# EAGLE board SparkFun Soft Power Switch-Panel (EAGLE 9.6.2), part 1 of 4
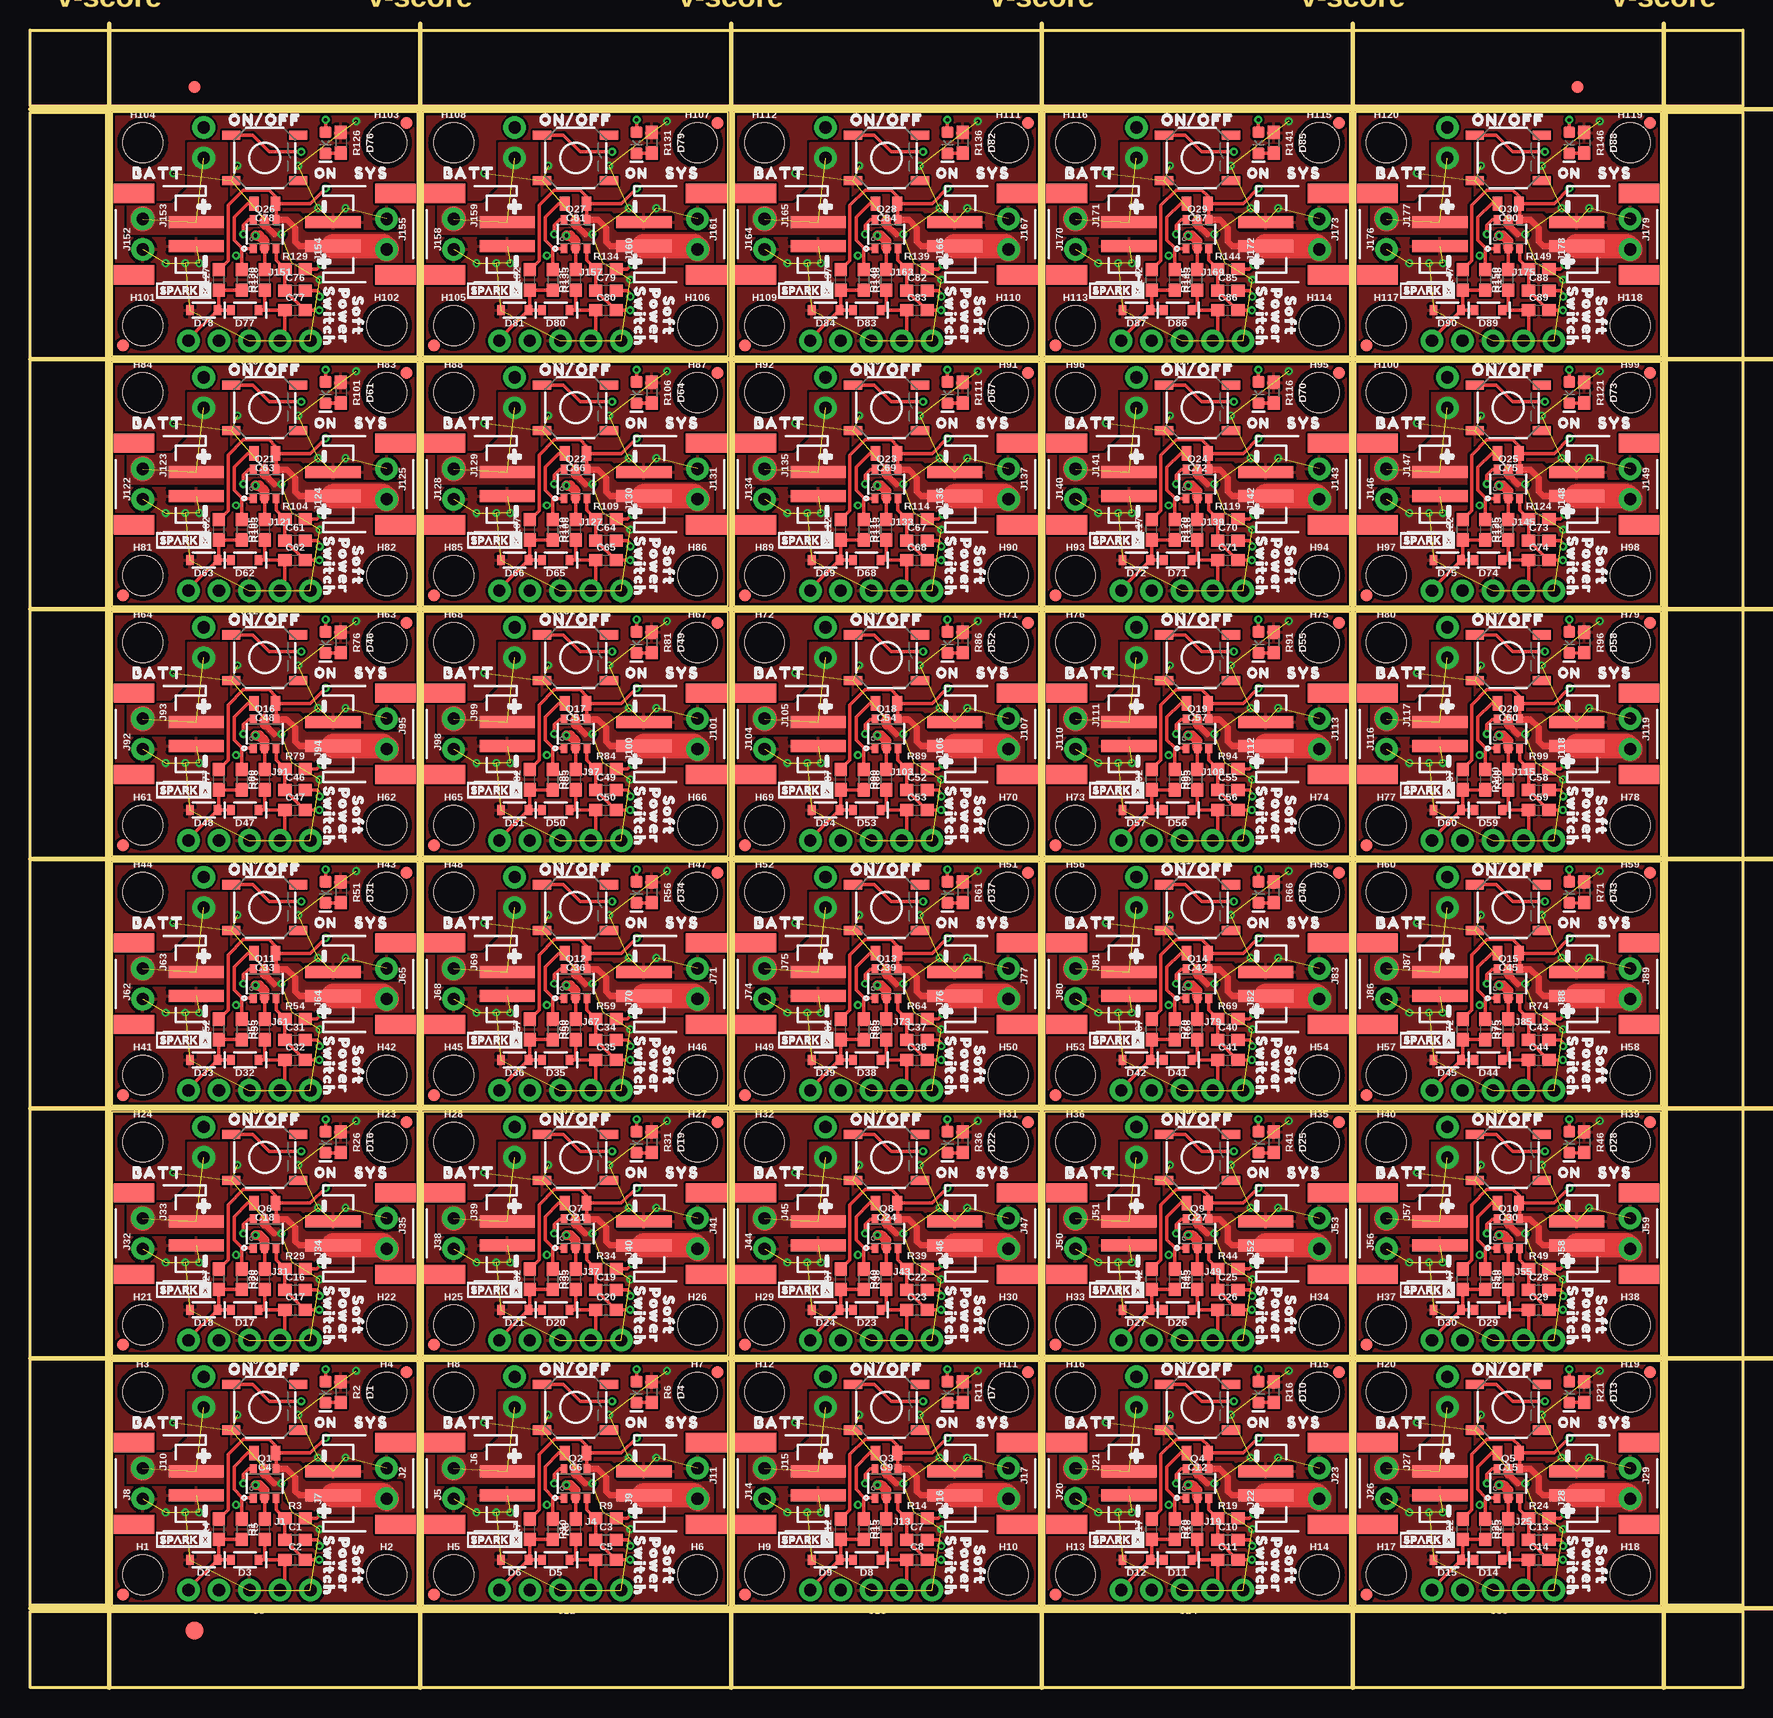
[diagram p0: board, top side]
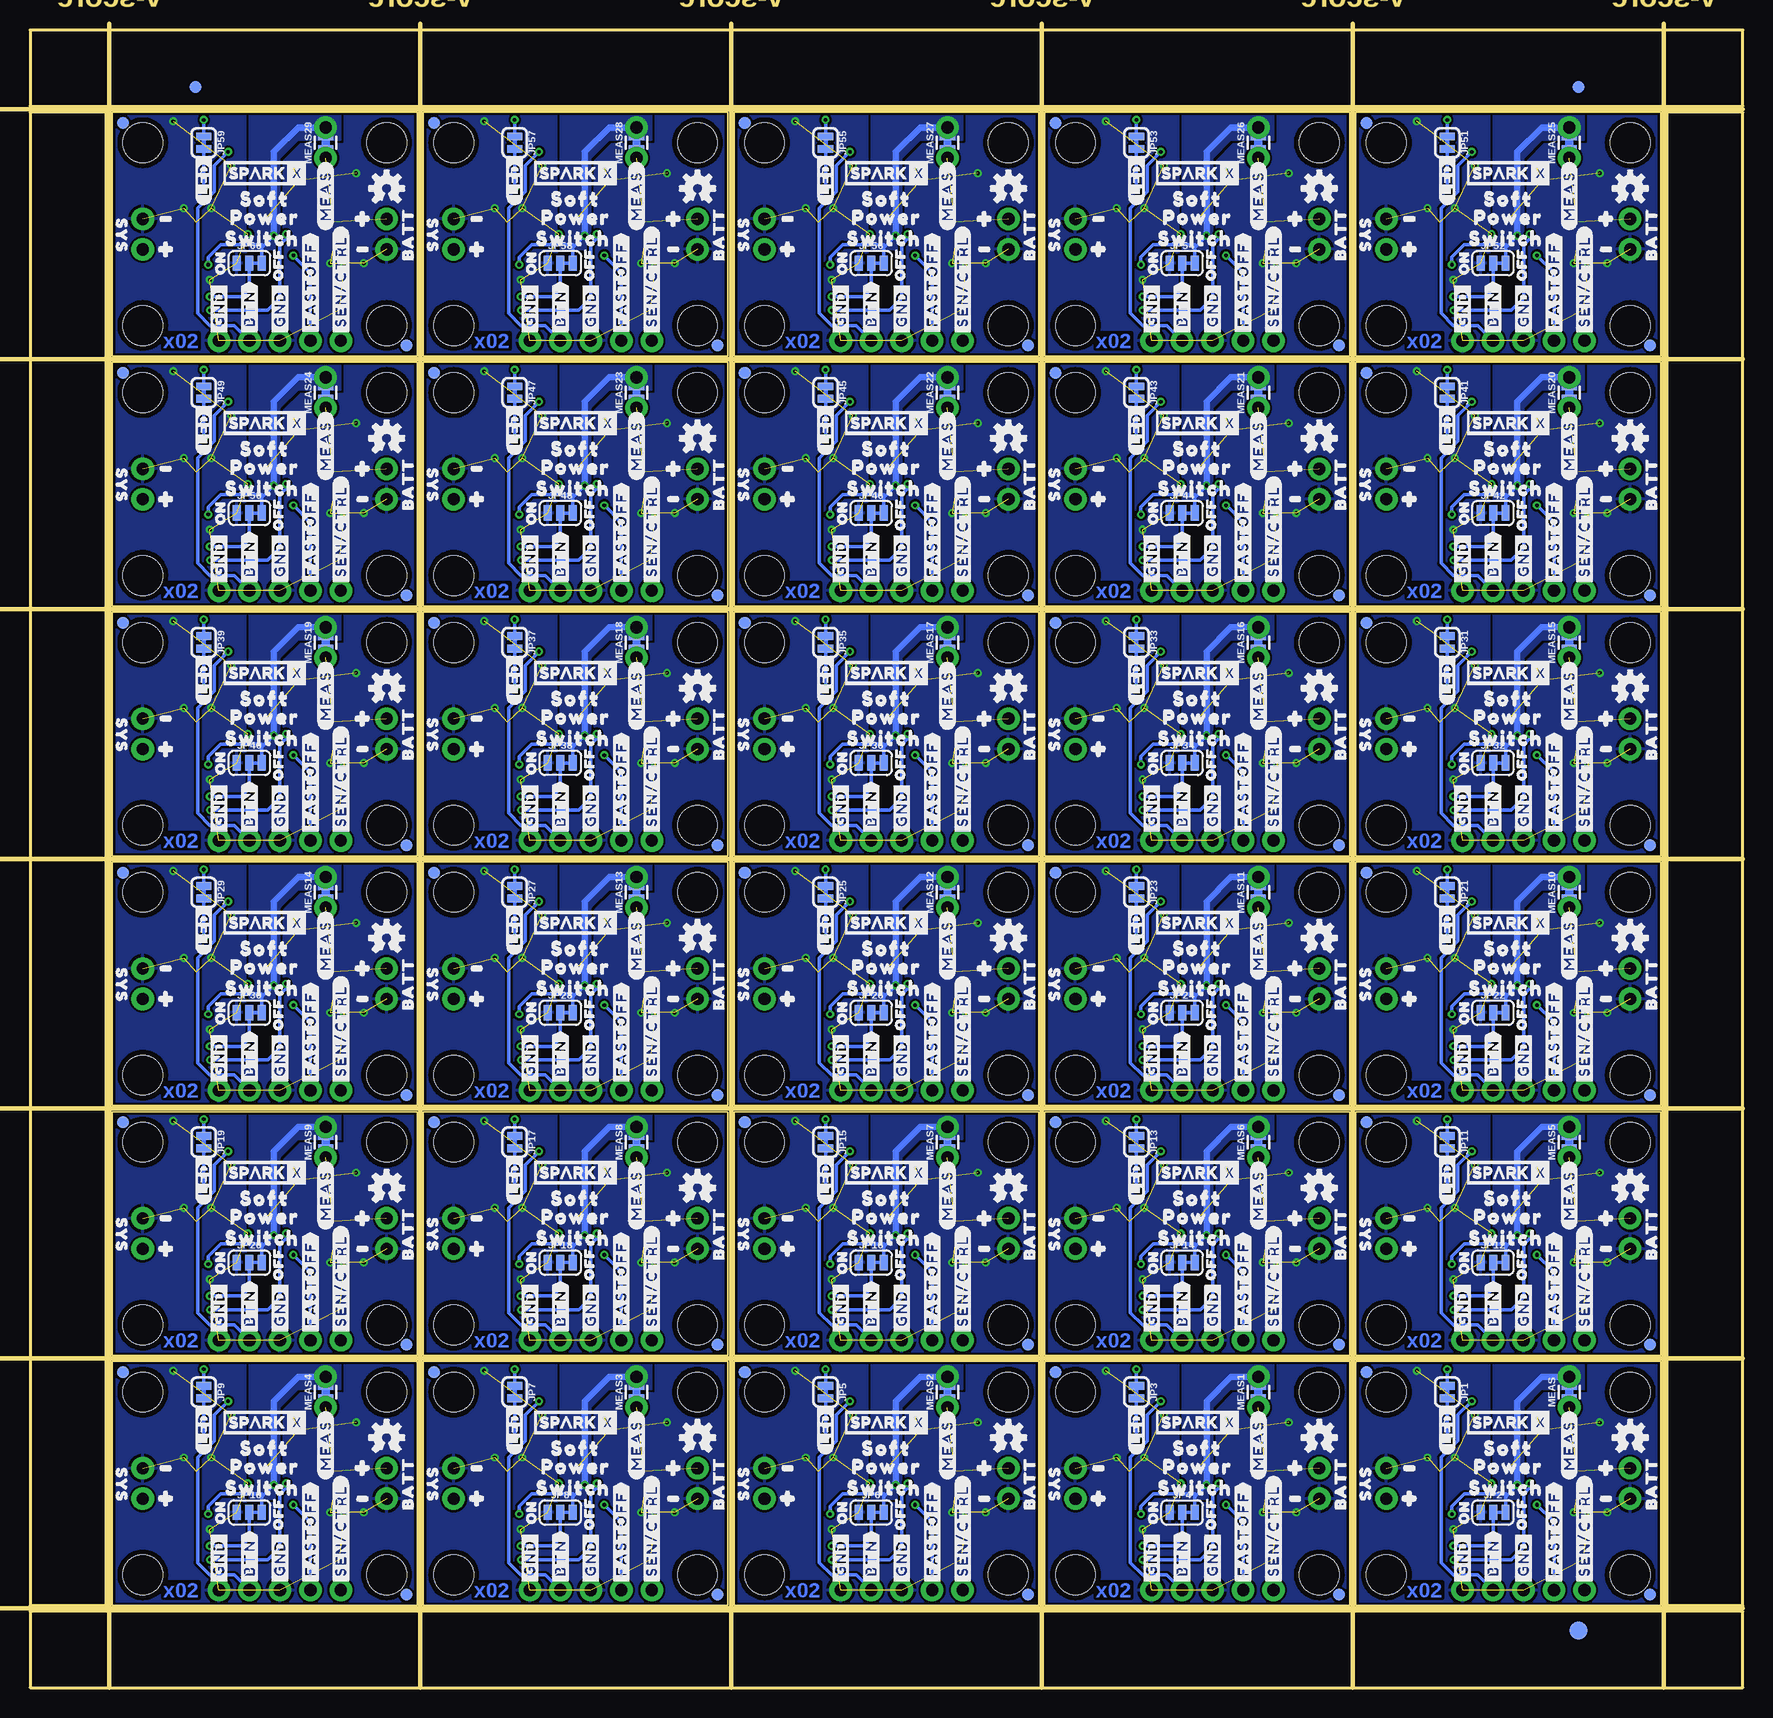
[diagram p1: board, bottom side, seen from below]

Size 142.75 x 138.18 mm. Coordinates in mm from the lower left corner, seen from the top.
Outline: 6.86,6.86 6.86,27.18 32.26,27.18 32.26,6.86 6.86,6.86
Outline: 32.77,6.86 32.77,27.18 58.17,27.18 58.17,6.86 32.77,6.86
Outline: 58.67,6.86 58.67,27.18 84.07,27.18 84.07,6.86 58.67,6.86
Outline: 84.58,6.86 84.58,27.18 109.98,27.18 109.98,6.86 84.58,6.86
Outline: 110.49,6.86 110.49,27.18 135.89,27.18 135.89,6.86 110.49,6.86
Outline: 6.86,27.69 6.86,48.01 32.26,48.01 32.26,27.69 6.86,27.69
Outline: 32.77,27.69 32.77,48.01 58.17,48.01 58.17,27.69 32.77,27.69
Outline: 58.67,27.69 58.67,48.01 84.07,48.01 84.07,27.69 58.67,27.69
Outline: 84.58,27.69 84.58,48.01 109.98,48.01 109.98,27.69 84.58,27.69
Outline: 110.49,27.69 110.49,48.01 135.89,48.01 135.89,27.69 110.49,27.69
Outline: 6.86,48.51 6.86,68.83 32.26,68.83 32.26,48.51 6.86,48.51
Outline: 32.77,48.51 32.77,68.83 58.17,68.83 58.17,48.51 32.77,48.51
Outline: 58.67,48.51 58.67,68.83 84.07,68.83 84.07,48.51 58.67,48.51
Outline: 84.58,48.51 84.58,68.83 109.98,68.83 109.98,48.51 84.58,48.51
Outline: 110.49,48.51 110.49,68.83 135.89,68.83 135.89,48.51 110.49,48.51
Outline: 6.86,69.34 6.86,89.66 32.26,89.66 32.26,69.34 6.86,69.34
Outline: 32.77,69.34 32.77,89.66 58.17,89.66 58.17,69.34 32.77,69.34
Outline: 58.67,69.34 58.67,89.66 84.07,89.66 84.07,69.34 58.67,69.34
Outline: 84.58,69.34 84.58,89.66 109.98,89.66 109.98,69.34 84.58,69.34
Outline: 110.49,69.34 110.49,89.66 135.89,89.66 135.89,69.34 110.49,69.34
Outline: 6.86,90.17 6.86,110.49 32.26,110.49 32.26,90.17 6.86,90.17
Outline: 32.77,90.17 32.77,110.49 58.17,110.49 58.17,90.17 32.77,90.17
Outline: 58.67,90.17 58.67,110.49 84.07,110.49 84.07,90.17 58.67,90.17
Outline: 84.58,90.17 84.58,110.49 109.98,110.49 109.98,90.17 84.58,90.17
Outline: 110.49,90.17 110.49,110.49 135.89,110.49 135.89,90.17 110.49,90.17
Outline: 6.86,111 6.86,131.32 32.26,131.32 32.26,111 6.86,111
Outline: 32.77,111 32.77,131.32 58.17,131.32 58.17,111 32.77,111
Outline: 58.67,111 58.67,131.32 84.07,131.32 84.07,111 58.67,111
Outline: 84.58,111 84.58,131.32 109.98,131.32 109.98,111 84.58,111
Outline: 110.49,111 110.49,131.32 135.89,131.32 135.89,111 110.49,111
Outline: 0,6.35 142.75,6.35 142.75,0 0,0 0,6.35
Outline: 136.4,131.32 142.75,131.32 142.75,6.86 136.4,6.86 136.4,131.32
Outline: 0,138.18 142.75,138.18 142.75,131.83 0,131.83 0,138.18
Outline: 0,131.32 6.35,131.32 6.35,6.86 0,6.86 0,131.32
Copper layers (1*16): Top 0.035mm / dielectric 1.5mm / Bottom 0.035mm
Design rules "SparkFun Soft Power Switch": minimum track width 7mil, minimum drill 0.3mm, track to track 7mil, track to pad 7mil, pad to pad 7mil, via to via 7mil, smd to smd 7mil, copper to edge 7mil, drill to drill 7mil, minimum pad ring 7mil, minimum via ring 7mil, stop-mask expansion 4mil, vias tented up to drill 25mil, thermal gap 10mil
Net classes: 1 power: width 0.305 mm
Milling: 13 lines

## Footprints (pad centres in the part's own frame; a part is rotated, then mirrored left to right if it is on the bottom)
0603 = smd 1.1 x 1: 1 -0.85,0; 2 0.85,0
0805 = smd 0.8 x 1.2: 1 -0.9,0; 2 0.9,0
LED-0603 = smd 1 x 1: A -0.877,0; C 0.877,0
SOD-323 = smd 0.63 x 0.83: A 1.15,0; C -1.15,0
FIDUCIAL-1X2 = smd 1 x 1: 1 0,0
FIDUCIAL-1.5X3 = smd 1.5 x 1.5: 1 0,0
STAND-OFF = hole 3.302: 0,0
1X02_NO_SILK = drill 1.016 pad 1.88: 1 0,0; 2 2.54,0
JST-2-SMD = smd 1 x 4.6: 1 -1,-3.7; 2 1,-3.7 | smd 1.6 x 3.4: NC1 -3.4,1.5; NC2 3.4,1.5
1X03_NO_SILK = drill 1.016 pad 1.88: 1 0,0; 2 2.54,0; 3 5.08,0
SMT-JUMPER_2_NC_TRACE_SILK = smd 0.66 x 1.27: 1 -0.521,0; 2 0.521,0
SMT-JUMPER_3_1-NC_TRACE_SILK = smd 0.66 x 1.27: 1 -1.041,0; 2 0,0; 3 1.041,0
COMBO-JUMPER_2_NC_TRACE = smd 0.635 x 1.27: 1 -0.508,0; 2 0.508,0 | drill 1.016 pad 1.88: 3 -1.27,0; 4 1.27,0
SOT26 = smd 0.55 x 0.8: D1 -0.95,1.2; D2 0.95,1.2; G1 -0.95,-1.2; G2 0.95,-1.2; S1 0,1.2; S2 0,-1.2
TACTILE_SWITCH_SMD_5.2MM = smd 1.524 x 0.762: 1 -2.794,1.905; 2 2.794,1.905; 3 -2.794,-1.905; 4 2.794,-1.905

## Placement (x,y rotation side)
C1  0.1uF  [0603]  22.1,12.32 0 top
C2  0.1uF  [0603]  22.1,10.67 0 top
C3  0.1uF  [0603]  48.01,12.32 0 top
C4  22uF  [0805]  19.56,19.56 180 top
C5  0.1uF  [0603]  48.01,10.67 0 top
C6  22uF  [0805]  45.47,19.56 180 top
C7  0.1uF  [0603]  73.91,12.32 0 top
C8  0.1uF  [0603]  73.91,10.67 0 top
C9  22uF  [0805]  71.37,19.56 180 top
C10  0.1uF  [0603]  99.82,12.32 0 top
C11  0.1uF  [0603]  99.82,10.67 0 top
C12  22uF  [0805]  97.28,19.56 180 top
C13  0.1uF  [0603]  125.73,12.32 0 top
C14  0.1uF  [0603]  125.73,10.67 0 top
C15  22uF  [0805]  123.19,19.56 180 top
C16  0.1uF  [0603]  22.1,33.15 0 top
C17  0.1uF  [0603]  22.1,31.5 0 top
C18  22uF  [0805]  19.56,40.39 180 top
C19  0.1uF  [0603]  48.01,33.15 0 top
C20  0.1uF  [0603]  48.01,31.5 0 top
C21  22uF  [0805]  45.47,40.39 180 top
C22  0.1uF  [0603]  73.91,33.15 0 top
C23  0.1uF  [0603]  73.91,31.5 0 top
C24  22uF  [0805]  71.37,40.39 180 top
C25  0.1uF  [0603]  99.82,33.15 0 top
C26  0.1uF  [0603]  99.82,31.5 0 top
C27  22uF  [0805]  97.28,40.39 180 top
C28  0.1uF  [0603]  125.73,33.15 0 top
C29  0.1uF  [0603]  125.73,31.5 0 top
C30  22uF  [0805]  123.19,40.39 180 top
C31  0.1uF  [0603]  22.1,53.97 0 top
C32  0.1uF  [0603]  22.1,52.32 0 top
C33  22uF  [0805]  19.56,61.21 180 top
C34  0.1uF  [0603]  48.01,53.97 0 top
C35  0.1uF  [0603]  48.01,52.32 0 top
C36  22uF  [0805]  45.47,61.21 180 top
C37  0.1uF  [0603]  73.91,53.97 0 top
C38  0.1uF  [0603]  73.91,52.32 0 top
C39  22uF  [0805]  71.37,61.21 180 top
C40  0.1uF  [0603]  99.82,53.97 0 top
C41  0.1uF  [0603]  99.82,52.32 0 top
C42  22uF  [0805]  97.28,61.21 180 top
C43  0.1uF  [0603]  125.73,53.97 0 top
C44  0.1uF  [0603]  125.73,52.32 0 top
C45  22uF  [0805]  123.19,61.21 180 top
C46  0.1uF  [0603]  22.1,74.8 0 top
C47  0.1uF  [0603]  22.1,73.15 0 top
C48  22uF  [0805]  19.56,82.04 180 top
C49  0.1uF  [0603]  48.01,74.8 0 top
C50  0.1uF  [0603]  48.01,73.15 0 top
C51  22uF  [0805]  45.47,82.04 180 top
C52  0.1uF  [0603]  73.91,74.8 0 top
C53  0.1uF  [0603]  73.91,73.15 0 top
C54  22uF  [0805]  71.37,82.04 180 top
C55  0.1uF  [0603]  99.82,74.8 0 top
C56  0.1uF  [0603]  99.82,73.15 0 top
C57  22uF  [0805]  97.28,82.04 180 top
C58  0.1uF  [0603]  125.73,74.8 0 top
C59  0.1uF  [0603]  125.73,73.15 0 top
C60  22uF  [0805]  123.19,82.04 180 top
C61  0.1uF  [0603]  22.1,95.63 0 top
C62  0.1uF  [0603]  22.1,93.98 0 top
C63  22uF  [0805]  19.56,102.87 180 top
C64  0.1uF  [0603]  48.01,95.63 0 top
C65  0.1uF  [0603]  48.01,93.98 0 top
C66  22uF  [0805]  45.47,102.87 180 top
C67  0.1uF  [0603]  73.91,95.63 0 top
C68  0.1uF  [0603]  73.91,93.98 0 top
C69  22uF  [0805]  71.37,102.87 180 top
C70  0.1uF  [0603]  99.82,95.63 0 top
C71  0.1uF  [0603]  99.82,93.98 0 top
C72  22uF  [0805]  97.28,102.87 180 top
C73  0.1uF  [0603]  125.73,95.63 0 top
C74  0.1uF  [0603]  125.73,93.98 0 top
C75  22uF  [0805]  123.19,102.87 180 top
C76  0.1uF  [0603]  22.1,116.46 0 top
C77  0.1uF  [0603]  22.1,114.81 0 top
C78  22uF  [0805]  19.56,123.7 180 top
C79  0.1uF  [0603]  48.01,116.46 0 top
C80  0.1uF  [0603]  48.01,114.81 0 top
C81  22uF  [0805]  45.47,123.7 180 top
C82  0.1uF  [0603]  73.91,116.46 0 top
C83  0.1uF  [0603]  73.91,114.81 0 top
C84  22uF  [0805]  71.37,123.7 180 top
C85  0.1uF  [0603]  99.82,116.46 0 top
C86  0.1uF  [0603]  99.82,114.81 0 top
C87  22uF  [0805]  97.28,123.7 180 top
C88  0.1uF  [0603]  125.73,116.46 0 top
C89  0.1uF  [0603]  125.73,114.81 0 top
C90  22uF  [0805]  123.19,123.7 180 top
D1  Power  [LED-0603]  24.64,24.64 270 top
D2  3.3V  [SOD-323]  14.48,10.67 180 top
D3  250mA/100V  [SOD-323]  17.91,10.67 180 top
D4  Power  [LED-0603]  50.55,24.64 270 top
D5  250mA/100V  [SOD-323]  43.81,10.67 180 top
D6  3.3V  [SOD-323]  40.39,10.67 180 top
D7  Power  [LED-0603]  76.45,24.64 270 top
D8  250mA/100V  [SOD-323]  69.72,10.67 180 top
D9  3.3V  [SOD-323]  66.29,10.67 180 top
D10  Power  [LED-0603]  102.36,24.64 270 top
D11  250mA/100V  [SOD-323]  95.63,10.67 180 top
D12  3.3V  [SOD-323]  92.2,10.67 180 top
D13  Power  [LED-0603]  128.27,24.64 270 top
D14  250mA/100V  [SOD-323]  121.54,10.67 180 top
D15  3.3V  [SOD-323]  118.11,10.67 180 top
D16  Power  [LED-0603]  24.64,45.47 270 top
D17  250mA/100V  [SOD-323]  17.91,31.5 180 top
D18  3.3V  [SOD-323]  14.48,31.5 180 top
D19  Power  [LED-0603]  50.55,45.47 270 top
D20  250mA/100V  [SOD-323]  43.81,31.5 180 top
D21  3.3V  [SOD-323]  40.39,31.5 180 top
D22  Power  [LED-0603]  76.45,45.47 270 top
D23  250mA/100V  [SOD-323]  69.72,31.5 180 top
D24  3.3V  [SOD-323]  66.29,31.5 180 top
D25  Power  [LED-0603]  102.36,45.47 270 top
D26  250mA/100V  [SOD-323]  95.63,31.5 180 top
D27  3.3V  [SOD-323]  92.2,31.5 180 top
D28  Power  [LED-0603]  128.27,45.47 270 top
D29  250mA/100V  [SOD-323]  121.54,31.5 180 top
D30  3.3V  [SOD-323]  118.11,31.5 180 top
D31  Power  [LED-0603]  24.64,66.29 270 top
D32  250mA/100V  [SOD-323]  17.91,52.32 180 top
D33  3.3V  [SOD-323]  14.48,52.32 180 top
D34  Power  [LED-0603]  50.55,66.29 270 top
D35  250mA/100V  [SOD-323]  43.81,52.32 180 top
D36  3.3V  [SOD-323]  40.39,52.32 180 top
D37  Power  [LED-0603]  76.45,66.29 270 top
D38  250mA/100V  [SOD-323]  69.72,52.32 180 top
D39  3.3V  [SOD-323]  66.29,52.32 180 top
D40  Power  [LED-0603]  102.36,66.29 270 top
D41  250mA/100V  [SOD-323]  95.63,52.32 180 top
D42  3.3V  [SOD-323]  92.2,52.32 180 top
D43  Power  [LED-0603]  128.27,66.29 270 top
D44  250mA/100V  [SOD-323]  121.54,52.32 180 top
D45  3.3V  [SOD-323]  118.11,52.32 180 top
D46  Power  [LED-0603]  24.64,87.12 270 top
D47  250mA/100V  [SOD-323]  17.91,73.15 180 top
D48  3.3V  [SOD-323]  14.48,73.15 180 top
D49  Power  [LED-0603]  50.55,87.12 270 top
D50  250mA/100V  [SOD-323]  43.81,73.15 180 top
D51  3.3V  [SOD-323]  40.39,73.15 180 top
D52  Power  [LED-0603]  76.45,87.12 270 top
D53  250mA/100V  [SOD-323]  69.72,73.15 180 top
D54  3.3V  [SOD-323]  66.29,73.15 180 top
D55  Power  [LED-0603]  102.36,87.12 270 top
D56  250mA/100V  [SOD-323]  95.63,73.15 180 top
D57  3.3V  [SOD-323]  92.2,73.15 180 top
D58  Power  [LED-0603]  128.27,87.12 270 top
D59  250mA/100V  [SOD-323]  121.54,73.15 180 top
D60  3.3V  [SOD-323]  118.11,73.15 180 top
D61  Power  [LED-0603]  24.64,107.95 270 top
D62  250mA/100V  [SOD-323]  17.91,93.98 180 top
D63  3.3V  [SOD-323]  14.48,93.98 180 top
D64  Power  [LED-0603]  50.55,107.95 270 top
D65  250mA/100V  [SOD-323]  43.81,93.98 180 top
D66  3.3V  [SOD-323]  40.39,93.98 180 top
D67  Power  [LED-0603]  76.45,107.95 270 top
D68  250mA/100V  [SOD-323]  69.72,93.98 180 top
D69  3.3V  [SOD-323]  66.29,93.98 180 top
D70  Power  [LED-0603]  102.36,107.95 270 top
D71  250mA/100V  [SOD-323]  95.63,93.98 180 top
D72  3.3V  [SOD-323]  92.2,93.98 180 top
D73  Power  [LED-0603]  128.27,107.95 270 top
D74  250mA/100V  [SOD-323]  121.54,93.98 180 top
D75  3.3V  [SOD-323]  118.11,93.98 180 top
D76  Power  [LED-0603]  24.64,128.78 270 top
D77  250mA/100V  [SOD-323]  17.91,114.81 180 top
D78  3.3V  [SOD-323]  14.48,114.81 180 top
D79  Power  [LED-0603]  50.55,128.78 270 top
D80  250mA/100V  [SOD-323]  43.81,114.81 180 top
D81  3.3V  [SOD-323]  40.39,114.81 180 top
D82  Power  [LED-0603]  76.45,128.78 270 top
D83  250mA/100V  [SOD-323]  69.72,114.81 180 top
D84  3.3V  [SOD-323]  66.29,114.81 180 top
D85  Power  [LED-0603]  102.36,128.78 270 top
D86  250mA/100V  [SOD-323]  95.63,114.81 180 top
D87  3.3V  [SOD-323]  92.2,114.81 180 top
D88  Power  [LED-0603]  128.27,128.78 270 top
D89  250mA/100V  [SOD-323]  121.54,114.81 180 top
D90  3.3V  [SOD-323]  118.11,114.81 180 top
E$1  [FIDUCIAL-1X2]  13.72,133.41 0 top
E$2  [FIDUCIAL-1X2]  13.72,133.41 0 bottom
E$3  [FIDUCIAL-1X2]  128.97,133.41 0 top
E$4  [FIDUCIAL-1X2]  128.97,133.41 0 bottom
E$5  [FIDUCIAL-1.5X3]  13.72,4.76 0 top
E$6  [FIDUCIAL-1.5X3]  13.72,4.76 0 bottom
FD1  FIDUCIAL1X2  [FIDUCIAL-1X2]  31.37,26.29 0 top
FD2  FIDUCIAL1X2  [FIDUCIAL-1X2]  7.75,7.75 0 bottom
FD3  FIDUCIAL1X2  [FIDUCIAL-1X2]  31.37,26.29 0 bottom
FD4  FIDUCIAL1X2  [FIDUCIAL-1X2]  7.75,7.75 0 top
FD5  FIDUCIAL1X2  [FIDUCIAL-1X2]  57.28,26.29 0 top
FD6  FIDUCIAL1X2  [FIDUCIAL-1X2]  33.66,7.75 0 bottom
FD7  FIDUCIAL1X2  [FIDUCIAL-1X2]  57.28,26.29 0 bottom
FD8  FIDUCIAL1X2  [FIDUCIAL-1X2]  33.66,7.75 0 top
FD9  FIDUCIAL1X2  [FIDUCIAL-1X2]  83.19,26.29 0 top
FD10  FIDUCIAL1X2  [FIDUCIAL-1X2]  59.56,7.75 0 bottom
FD11  FIDUCIAL1X2  [FIDUCIAL-1X2]  83.19,26.29 0 bottom
FD12  FIDUCIAL1X2  [FIDUCIAL-1X2]  59.56,7.75 0 top
FD13  FIDUCIAL1X2  [FIDUCIAL-1X2]  109.09,26.29 0 top
FD14  FIDUCIAL1X2  [FIDUCIAL-1X2]  85.47,7.75 0 bottom
FD15  FIDUCIAL1X2  [FIDUCIAL-1X2]  109.09,26.29 0 bottom
FD16  FIDUCIAL1X2  [FIDUCIAL-1X2]  85.47,7.75 0 top
FD17  FIDUCIAL1X2  [FIDUCIAL-1X2]  135,26.29 0 top
FD18  FIDUCIAL1X2  [FIDUCIAL-1X2]  111.38,7.75 0 bottom
FD19  FIDUCIAL1X2  [FIDUCIAL-1X2]  135,26.29 0 bottom
FD20  FIDUCIAL1X2  [FIDUCIAL-1X2]  111.38,7.75 0 top
FD21  FIDUCIAL1X2  [FIDUCIAL-1X2]  31.37,47.12 0 top
FD22  FIDUCIAL1X2  [FIDUCIAL-1X2]  7.75,28.57 0 bottom
FD23  FIDUCIAL1X2  [FIDUCIAL-1X2]  31.37,47.12 0 bottom
FD24  FIDUCIAL1X2  [FIDUCIAL-1X2]  7.75,28.57 0 top
FD25  FIDUCIAL1X2  [FIDUCIAL-1X2]  57.28,47.12 0 top
FD26  FIDUCIAL1X2  [FIDUCIAL-1X2]  33.66,28.57 0 bottom
FD27  FIDUCIAL1X2  [FIDUCIAL-1X2]  57.28,47.12 0 bottom
FD28  FIDUCIAL1X2  [FIDUCIAL-1X2]  33.66,28.57 0 top
FD29  FIDUCIAL1X2  [FIDUCIAL-1X2]  83.19,47.12 0 top
FD30  FIDUCIAL1X2  [FIDUCIAL-1X2]  59.56,28.57 0 bottom
FD31  FIDUCIAL1X2  [FIDUCIAL-1X2]  83.19,47.12 0 bottom
FD32  FIDUCIAL1X2  [FIDUCIAL-1X2]  59.56,28.57 0 top
FD33  FIDUCIAL1X2  [FIDUCIAL-1X2]  109.09,47.12 0 top
FD34  FIDUCIAL1X2  [FIDUCIAL-1X2]  85.47,28.57 0 bottom
FD35  FIDUCIAL1X2  [FIDUCIAL-1X2]  109.09,47.12 0 bottom
FD36  FIDUCIAL1X2  [FIDUCIAL-1X2]  85.47,28.57 0 top
FD37  FIDUCIAL1X2  [FIDUCIAL-1X2]  135,47.12 0 top
FD38  FIDUCIAL1X2  [FIDUCIAL-1X2]  111.38,28.57 0 bottom
FD39  FIDUCIAL1X2  [FIDUCIAL-1X2]  135,47.12 0 bottom
FD40  FIDUCIAL1X2  [FIDUCIAL-1X2]  111.38,28.57 0 top
FD41  FIDUCIAL1X2  [FIDUCIAL-1X2]  31.37,67.95 0 top
FD42  FIDUCIAL1X2  [FIDUCIAL-1X2]  7.75,49.4 0 bottom
FD43  FIDUCIAL1X2  [FIDUCIAL-1X2]  31.37,67.95 0 bottom
FD44  FIDUCIAL1X2  [FIDUCIAL-1X2]  7.75,49.4 0 top
FD45  FIDUCIAL1X2  [FIDUCIAL-1X2]  57.28,67.95 0 top
FD46  FIDUCIAL1X2  [FIDUCIAL-1X2]  33.66,49.4 0 bottom
FD47  FIDUCIAL1X2  [FIDUCIAL-1X2]  57.28,67.95 0 bottom
FD48  FIDUCIAL1X2  [FIDUCIAL-1X2]  33.66,49.4 0 top
FD49  FIDUCIAL1X2  [FIDUCIAL-1X2]  83.19,67.95 0 top
FD50  FIDUCIAL1X2  [FIDUCIAL-1X2]  59.56,49.4 0 bottom
FD51  FIDUCIAL1X2  [FIDUCIAL-1X2]  83.19,67.95 0 bottom
FD52  FIDUCIAL1X2  [FIDUCIAL-1X2]  59.56,49.4 0 top
FD53  FIDUCIAL1X2  [FIDUCIAL-1X2]  109.09,67.95 0 top
FD54  FIDUCIAL1X2  [FIDUCIAL-1X2]  85.47,49.4 0 bottom
FD55  FIDUCIAL1X2  [FIDUCIAL-1X2]  109.09,67.95 0 bottom
FD56  FIDUCIAL1X2  [FIDUCIAL-1X2]  85.47,49.4 0 top
FD57  FIDUCIAL1X2  [FIDUCIAL-1X2]  135,67.95 0 top
FD58  FIDUCIAL1X2  [FIDUCIAL-1X2]  111.38,49.4 0 bottom
FD59  FIDUCIAL1X2  [FIDUCIAL-1X2]  135,67.95 0 bottom
FD60  FIDUCIAL1X2  [FIDUCIAL-1X2]  111.38,49.4 0 top
FD61  FIDUCIAL1X2  [FIDUCIAL-1X2]  31.37,88.77 0 top
FD62  FIDUCIAL1X2  [FIDUCIAL-1X2]  7.75,70.23 0 bottom
FD63  FIDUCIAL1X2  [FIDUCIAL-1X2]  31.37,88.77 0 bottom
FD64  FIDUCIAL1X2  [FIDUCIAL-1X2]  7.75,70.23 0 top
FD65  FIDUCIAL1X2  [FIDUCIAL-1X2]  57.28,88.77 0 top
FD66  FIDUCIAL1X2  [FIDUCIAL-1X2]  33.66,70.23 0 bottom
FD67  FIDUCIAL1X2  [FIDUCIAL-1X2]  57.28,88.77 0 bottom
FD68  FIDUCIAL1X2  [FIDUCIAL-1X2]  33.66,70.23 0 top
FD69  FIDUCIAL1X2  [FIDUCIAL-1X2]  83.19,88.77 0 top
FD70  FIDUCIAL1X2  [FIDUCIAL-1X2]  59.56,70.23 0 bottom
FD71  FIDUCIAL1X2  [FIDUCIAL-1X2]  83.19,88.77 0 bottom
FD72  FIDUCIAL1X2  [FIDUCIAL-1X2]  59.56,70.23 0 top
FD73  FIDUCIAL1X2  [FIDUCIAL-1X2]  109.09,88.77 0 top
FD74  FIDUCIAL1X2  [FIDUCIAL-1X2]  85.47,70.23 0 bottom
FD75  FIDUCIAL1X2  [FIDUCIAL-1X2]  109.09,88.77 0 bottom
FD76  FIDUCIAL1X2  [FIDUCIAL-1X2]  85.47,70.23 0 top
FD77  FIDUCIAL1X2  [FIDUCIAL-1X2]  135,88.77 0 top
FD78  FIDUCIAL1X2  [FIDUCIAL-1X2]  111.38,70.23 0 bottom
FD79  FIDUCIAL1X2  [FIDUCIAL-1X2]  135,88.77 0 bottom
FD80  FIDUCIAL1X2  [FIDUCIAL-1X2]  111.38,70.23 0 top
FD81  FIDUCIAL1X2  [FIDUCIAL-1X2]  31.37,109.6 0 top
FD82  FIDUCIAL1X2  [FIDUCIAL-1X2]  7.75,91.06 0 bottom
FD83  FIDUCIAL1X2  [FIDUCIAL-1X2]  31.37,109.6 0 bottom
FD84  FIDUCIAL1X2  [FIDUCIAL-1X2]  7.75,91.06 0 top
FD85  FIDUCIAL1X2  [FIDUCIAL-1X2]  57.28,109.6 0 top
FD86  FIDUCIAL1X2  [FIDUCIAL-1X2]  33.66,91.06 0 bottom
FD87  FIDUCIAL1X2  [FIDUCIAL-1X2]  57.28,109.6 0 bottom
FD88  FIDUCIAL1X2  [FIDUCIAL-1X2]  33.66,91.06 0 top
FD89  FIDUCIAL1X2  [FIDUCIAL-1X2]  83.19,109.6 0 top
FD90  FIDUCIAL1X2  [FIDUCIAL-1X2]  59.56,91.06 0 bottom
FD91  FIDUCIAL1X2  [FIDUCIAL-1X2]  83.19,109.6 0 bottom
FD92  FIDUCIAL1X2  [FIDUCIAL-1X2]  59.56,91.06 0 top
FD93  FIDUCIAL1X2  [FIDUCIAL-1X2]  109.09,109.6 0 top
FD94  FIDUCIAL1X2  [FIDUCIAL-1X2]  85.47,91.06 0 bottom
FD95  FIDUCIAL1X2  [FIDUCIAL-1X2]  109.09,109.6 0 bottom
FD96  FIDUCIAL1X2  [FIDUCIAL-1X2]  85.47,91.06 0 top
FD97  FIDUCIAL1X2  [FIDUCIAL-1X2]  135,109.6 0 top
FD98  FIDUCIAL1X2  [FIDUCIAL-1X2]  111.38,91.06 0 bottom
FD99  FIDUCIAL1X2  [FIDUCIAL-1X2]  135,109.6 0 bottom
FD100  FIDUCIAL1X2  [FIDUCIAL-1X2]  111.38,91.06 0 top
FD101  FIDUCIAL1X2  [FIDUCIAL-1X2]  31.37,130.43 0 top
FD102  FIDUCIAL1X2  [FIDUCIAL-1X2]  7.75,111.89 0 bottom
FD103  FIDUCIAL1X2  [FIDUCIAL-1X2]  31.37,130.43 0 bottom
FD104  FIDUCIAL1X2  [FIDUCIAL-1X2]  7.75,111.89 0 top
FD105  FIDUCIAL1X2  [FIDUCIAL-1X2]  57.28,130.43 0 top
FD106  FIDUCIAL1X2  [FIDUCIAL-1X2]  33.66,111.89 0 bottom
FD107  FIDUCIAL1X2  [FIDUCIAL-1X2]  57.28,130.43 0 bottom
FD108  FIDUCIAL1X2  [FIDUCIAL-1X2]  33.66,111.89 0 top
FD109  FIDUCIAL1X2  [FIDUCIAL-1X2]  83.19,130.43 0 top
FD110  FIDUCIAL1X2  [FIDUCIAL-1X2]  59.56,111.89 0 bottom
FD111  FIDUCIAL1X2  [FIDUCIAL-1X2]  83.19,130.43 0 bottom
FD112  FIDUCIAL1X2  [FIDUCIAL-1X2]  59.56,111.89 0 top
FD113  FIDUCIAL1X2  [FIDUCIAL-1X2]  109.09,130.43 0 top
FD114  FIDUCIAL1X2  [FIDUCIAL-1X2]  85.47,111.89 0 bottom
FD115  FIDUCIAL1X2  [FIDUCIAL-1X2]  109.09,130.43 0 bottom
FD116  FIDUCIAL1X2  [FIDUCIAL-1X2]  85.47,111.89 0 top
FD117  FIDUCIAL1X2  [FIDUCIAL-1X2]  135,130.43 0 top
FD118  FIDUCIAL1X2  [FIDUCIAL-1X2]  111.38,111.89 0 bottom
FD119  FIDUCIAL1X2  [FIDUCIAL-1X2]  135,130.43 0 bottom
FD120  FIDUCIAL1X2  [FIDUCIAL-1X2]  111.38,111.89 0 top
H1  STAND-OFF  [STAND-OFF]  9.4,9.4 0 top
H2  STAND-OFF  [STAND-OFF]  29.72,9.4 0 top
H3  STAND-OFF  [STAND-OFF]  9.4,24.64 0 top
H4  STAND-OFF  [STAND-OFF]  29.72,24.64 0 top
H5  STAND-OFF  [STAND-OFF]  35.31,9.4 0 top
H6  STAND-OFF  [STAND-OFF]  55.63,9.4 0 top
H7  STAND-OFF  [STAND-OFF]  55.63,24.64 0 top
H8  STAND-OFF  [STAND-OFF]  35.31,24.64 0 top
H9  STAND-OFF  [STAND-OFF]  61.21,9.4 0 top
H10  STAND-OFF  [STAND-OFF]  81.53,9.4 0 top
H11  STAND-OFF  [STAND-OFF]  81.53,24.64 0 top
H12  STAND-OFF  [STAND-OFF]  61.21,24.64 0 top
H13  STAND-OFF  [STAND-OFF]  87.12,9.4 0 top
H14  STAND-OFF  [STAND-OFF]  107.44,9.4 0 top
H15  STAND-OFF  [STAND-OFF]  107.44,24.64 0 top
H16  STAND-OFF  [STAND-OFF]  87.12,24.64 0 top
H17  STAND-OFF  [STAND-OFF]  113.03,9.4 0 top
H18  STAND-OFF  [STAND-OFF]  133.35,9.4 0 top
H19  STAND-OFF  [STAND-OFF]  133.35,24.64 0 top
H20  STAND-OFF  [STAND-OFF]  113.03,24.64 0 top
H21  STAND-OFF  [STAND-OFF]  9.4,30.23 0 top
H22  STAND-OFF  [STAND-OFF]  29.72,30.23 0 top
H23  STAND-OFF  [STAND-OFF]  29.72,45.47 0 top
H24  STAND-OFF  [STAND-OFF]  9.4,45.47 0 top
H25  STAND-OFF  [STAND-OFF]  35.31,30.23 0 top
H26  STAND-OFF  [STAND-OFF]  55.63,30.23 0 top
H27  STAND-OFF  [STAND-OFF]  55.63,45.47 0 top
H28  STAND-OFF  [STAND-OFF]  35.31,45.47 0 top
H29  STAND-OFF  [STAND-OFF]  61.21,30.23 0 top
H30  STAND-OFF  [STAND-OFF]  81.53,30.23 0 top
H31  STAND-OFF  [STAND-OFF]  81.53,45.47 0 top
H32  STAND-OFF  [STAND-OFF]  61.21,45.47 0 top
H33  STAND-OFF  [STAND-OFF]  87.12,30.23 0 top
H34  STAND-OFF  [STAND-OFF]  107.44,30.23 0 top
H35  STAND-OFF  [STAND-OFF]  107.44,45.47 0 top
H36  STAND-OFF  [STAND-OFF]  87.12,45.47 0 top
H37  STAND-OFF  [STAND-OFF]  113.03,30.23 0 top
H38  STAND-OFF  [STAND-OFF]  133.35,30.23 0 top
H39  STAND-OFF  [STAND-OFF]  133.35,45.47 0 top
H40  STAND-OFF  [STAND-OFF]  113.03,45.47 0 top
H41  STAND-OFF  [STAND-OFF]  9.4,51.05 0 top
H42  STAND-OFF  [STAND-OFF]  29.72,51.05 0 top
H43  STAND-OFF  [STAND-OFF]  29.72,66.29 0 top
H44  STAND-OFF  [STAND-OFF]  9.4,66.29 0 top
H45  STAND-OFF  [STAND-OFF]  35.31,51.05 0 top
H46  STAND-OFF  [STAND-OFF]  55.63,51.05 0 top
H47  STAND-OFF  [STAND-OFF]  55.63,66.29 0 top
H48  STAND-OFF  [STAND-OFF]  35.31,66.29 0 top
H49  STAND-OFF  [STAND-OFF]  61.21,51.05 0 top
H50  STAND-OFF  [STAND-OFF]  81.53,51.05 0 top
H51  STAND-OFF  [STAND-OFF]  81.53,66.29 0 top
H52  STAND-OFF  [STAND-OFF]  61.21,66.29 0 top
H53  STAND-OFF  [STAND-OFF]  87.12,51.05 0 top
H54  STAND-OFF  [STAND-OFF]  107.44,51.05 0 top
H55  STAND-OFF  [STAND-OFF]  107.44,66.29 0 top
H56  STAND-OFF  [STAND-OFF]  87.12,66.29 0 top
H57  STAND-OFF  [STAND-OFF]  113.03,51.05 0 top
H58  STAND-OFF  [STAND-OFF]  133.35,51.05 0 top
H59  STAND-OFF  [STAND-OFF]  133.35,66.29 0 top
H60  STAND-OFF  [STAND-OFF]  113.03,66.29 0 top
H61  STAND-OFF  [STAND-OFF]  9.4,71.88 0 top
H62  STAND-OFF  [STAND-OFF]  29.72,71.88 0 top
H63  STAND-OFF  [STAND-OFF]  29.72,87.12 0 top
H64  STAND-OFF  [STAND-OFF]  9.4,87.12 0 top
H65  STAND-OFF  [STAND-OFF]  35.31,71.88 0 top
H66  STAND-OFF  [STAND-OFF]  55.63,71.88 0 top
H67  STAND-OFF  [STAND-OFF]  55.63,87.12 0 top
H68  STAND-OFF  [STAND-OFF]  35.31,87.12 0 top
H69  STAND-OFF  [STAND-OFF]  61.21,71.88 0 top
H70  STAND-OFF  [STAND-OFF]  81.53,71.88 0 top
H71  STAND-OFF  [STAND-OFF]  81.53,87.12 0 top
H72  STAND-OFF  [STAND-OFF]  61.21,87.12 0 top
H73  STAND-OFF  [STAND-OFF]  87.12,71.88 0 top
H74  STAND-OFF  [STAND-OFF]  107.44,71.88 0 top
H75  STAND-OFF  [STAND-OFF]  107.44,87.12 0 top
H76  STAND-OFF  [STAND-OFF]  87.12,87.12 0 top
H77  STAND-OFF  [STAND-OFF]  113.03,71.88 0 top
H78  STAND-OFF  [STAND-OFF]  133.35,71.88 0 top
H79  STAND-OFF  [STAND-OFF]  133.35,87.12 0 top
H80  STAND-OFF  [STAND-OFF]  113.03,87.12 0 top
H81  STAND-OFF  [STAND-OFF]  9.4,92.71 0 top
H82  STAND-OFF  [STAND-OFF]  29.72,92.71 0 top
H83  STAND-OFF  [STAND-OFF]  29.72,107.95 0 top
H84  STAND-OFF  [STAND-OFF]  9.4,107.95 0 top
H85  STAND-OFF  [STAND-OFF]  35.31,92.71 0 top
H86  STAND-OFF  [STAND-OFF]  55.63,92.71 0 top
H87  STAND-OFF  [STAND-OFF]  55.63,107.95 0 top
H88  STAND-OFF  [STAND-OFF]  35.31,107.95 0 top
H89  STAND-OFF  [STAND-OFF]  61.21,92.71 0 top
H90  STAND-OFF  [STAND-OFF]  81.53,92.71 0 top
H91  STAND-OFF  [STAND-OFF]  81.53,107.95 0 top
H92  STAND-OFF  [STAND-OFF]  61.21,107.95 0 top
H93  STAND-OFF  [STAND-OFF]  87.12,92.71 0 top
H94  STAND-OFF  [STAND-OFF]  107.44,92.71 0 top
H95  STAND-OFF  [STAND-OFF]  107.44,107.95 0 top
H96  STAND-OFF  [STAND-OFF]  87.12,107.95 0 top
H97  STAND-OFF  [STAND-OFF]  113.03,92.71 0 top
H98  STAND-OFF  [STAND-OFF]  133.35,92.71 0 top
H99  STAND-OFF  [STAND-OFF]  133.35,107.95 0 top
H100  STAND-OFF  [STAND-OFF]  113.03,107.95 0 top
H101  STAND-OFF  [STAND-OFF]  9.4,113.54 0 top
H102  STAND-OFF  [STAND-OFF]  29.72,113.54 0 top
H103  STAND-OFF  [STAND-OFF]  29.72,128.78 0 top
H104  STAND-OFF  [STAND-OFF]  9.4,128.78 0 top
H105  STAND-OFF  [STAND-OFF]  35.31,113.54 0 top
H106  STAND-OFF  [STAND-OFF]  55.63,113.54 0 top
H107  STAND-OFF  [STAND-OFF]  55.63,128.78 0 top
H108  STAND-OFF  [STAND-OFF]  35.31,128.78 0 top
H109  STAND-OFF  [STAND-OFF]  61.21,113.54 0 top
H110  STAND-OFF  [STAND-OFF]  81.53,113.54 0 top
H111  STAND-OFF  [STAND-OFF]  81.53,128.78 0 top
H112  STAND-OFF  [STAND-OFF]  61.21,128.78 0 top
H113  STAND-OFF  [STAND-OFF]  87.12,113.54 0 top
H114  STAND-OFF  [STAND-OFF]  107.44,113.54 0 top
H115  STAND-OFF  [STAND-OFF]  107.44,128.78 0 top
H116  STAND-OFF  [STAND-OFF]  87.12,128.78 0 top
H117  STAND-OFF  [STAND-OFF]  113.03,113.54 0 top
H118  STAND-OFF  [STAND-OFF]  133.35,113.54 0 top
H119  STAND-OFF  [STAND-OFF]  133.35,128.78 0 top
H120  STAND-OFF  [STAND-OFF]  113.03,128.78 0 top
J1  Ext Button  [1X02_NO_SILK]  20.83,8.13 0 top
J2  [JST-2-SMD]  28.96,17.02 270 top
J3  [1X03_NO_SILK]  18.29,8.13 180 top
J4  Ext Button  [1X02_NO_SILK]  46.74,8.13 0 top
J5  [JST-2-SMD]  36.07,17.02 90 top
J6  [1X02_NO_SILK]  35.31,18.29 270 top
J7  System Power  [1X02_NO_SILK]  29.72,15.75 90 top
J8  [JST-2-SMD]  10.16,17.02 90 top
J9  System Power  [1X02_NO_SILK]  55.63,15.75 90 top
J10  [1X02_NO_SILK]  9.4,18.29 270 top
J11  [JST-2-SMD]  54.86,17.02 270 top
J12  [1X03_NO_SILK]  44.2,8.13 180 top
J13  Ext Button  [1X02_NO_SILK]  72.64,8.13 0 top
J14  [JST-2-SMD]  61.98,17.02 90 top
J15  [1X02_NO_SILK]  61.21,18.29 270 top
J16  System Power  [1X02_NO_SILK]  81.53,15.75 90 top
J17  [JST-2-SMD]  80.77,17.02 270 top
J18  [1X03_NO_SILK]  70.1,8.13 180 top
J19  Ext Button  [1X02_NO_SILK]  98.55,8.13 0 top
J20  [JST-2-SMD]  87.88,17.02 90 top
J21  [1X02_NO_SILK]  87.12,18.29 270 top
J22  System Power  [1X02_NO_SILK]  107.44,15.75 90 top
J23  [JST-2-SMD]  106.68,17.02 270 top
J24  [1X03_NO_SILK]  96.01,8.13 180 top
J25  Ext Button  [1X02_NO_SILK]  124.46,8.13 0 top
J26  [JST-2-SMD]  113.79,17.02 90 top
J27  [1X02_NO_SILK]  113.03,18.29 270 top
J28  System Power  [1X02_NO_SILK]  133.35,15.75 90 top
J29  [JST-2-SMD]  132.59,17.02 270 top
J30  [1X03_NO_SILK]  121.92,8.13 180 top
J31  Ext Button  [1X02_NO_SILK]  20.83,28.96 0 top
J32  [JST-2-SMD]  10.16,37.85 90 top
J33  [1X02_NO_SILK]  9.4,39.12 270 top
J34  System Power  [1X02_NO_SILK]  29.72,36.58 90 top
J35  [JST-2-SMD]  28.96,37.85 270 top
J36  [1X03_NO_SILK]  18.29,28.96 180 top
J37  Ext Button  [1X02_NO_SILK]  46.74,28.96 0 top
J38  [JST-2-SMD]  36.07,37.85 90 top
J39  [1X02_NO_SILK]  35.31,39.12 270 top
J40  System Power  [1X02_NO_SILK]  55.63,36.58 90 top
J41  [JST-2-SMD]  54.86,37.85 270 top
J42  [1X03_NO_SILK]  44.2,28.96 180 top
J43  Ext Button  [1X02_NO_SILK]  72.64,28.96 0 top
J44  [JST-2-SMD]  61.98,37.85 90 top
J45  [1X02_NO_SILK]  61.21,39.12 270 top
J46  System Power  [1X02_NO_SILK]  81.53,36.58 90 top
J47  [JST-2-SMD]  80.77,37.85 270 top
J48  [1X03_NO_SILK]  70.1,28.96 180 top
J49  Ext Button  [1X02_NO_SILK]  98.55,28.96 0 top
J50  [JST-2-SMD]  87.88,37.85 90 top
J51  [1X02_NO_SILK]  87.12,39.12 270 top
J52  System Power  [1X02_NO_SILK]  107.44,36.58 90 top
J53  [JST-2-SMD]  106.68,37.85 270 top
J54  [1X03_NO_SILK]  96.01,28.96 180 top
J55  Ext Button  [1X02_NO_SILK]  124.46,28.96 0 top
J56  [JST-2-SMD]  113.79,37.85 90 top
J57  [1X02_NO_SILK]  113.03,39.12 270 top
J58  System Power  [1X02_NO_SILK]  133.35,36.58 90 top
J59  [JST-2-SMD]  132.59,37.85 270 top
J60  [1X03_NO_SILK]  121.92,28.96 180 top
J61  Ext Button  [1X02_NO_SILK]  20.83,49.78 0 top
J62  [JST-2-SMD]  10.16,58.67 90 top
J63  [1X02_NO_SILK]  9.4,59.94 270 top
J64  System Power  [1X02_NO_SILK]  29.72,57.4 90 top
J65  [JST-2-SMD]  28.96,58.67 270 top
J66  [1X03_NO_SILK]  18.29,49.78 180 top
J67  Ext Button  [1X02_NO_SILK]  46.74,49.78 0 top
J68  [JST-2-SMD]  36.07,58.67 90 top
J69  [1X02_NO_SILK]  35.31,59.94 270 top
J70  System Power  [1X02_NO_SILK]  55.63,57.4 90 top
J71  [JST-2-SMD]  54.86,58.67 270 top
J72  [1X03_NO_SILK]  44.2,49.78 180 top
J73  Ext Button  [1X02_NO_SILK]  72.64,49.78 0 top
J74  [JST-2-SMD]  61.98,58.67 90 top
J75  [1X02_NO_SILK]  61.21,59.94 270 top
J76  System Power  [1X02_NO_SILK]  81.53,57.4 90 top
J77  [JST-2-SMD]  80.77,58.67 270 top
J78  [1X03_NO_SILK]  70.1,49.78 180 top
J79  Ext Button  [1X02_NO_SILK]  98.55,49.78 0 top
J80  [JST-2-SMD]  87.88,58.67 90 top
J81  [1X02_NO_SILK]  87.12,59.94 270 top
J82  System Power  [1X02_NO_SILK]  107.44,57.4 90 top
J83  [JST-2-SMD]  106.68,58.67 270 top
J84  [1X03_NO_SILK]  96.01,49.78 180 top
J85  Ext Button  [1X02_NO_SILK]  124.46,49.78 0 top
J86  [JST-2-SMD]  113.79,58.67 90 top
J87  [1X02_NO_SILK]  113.03,59.94 270 top
J88  System Power  [1X02_NO_SILK]  133.35,57.4 90 top
J89  [JST-2-SMD]  132.59,58.67 270 top
J90  [1X03_NO_SILK]  121.92,49.78 180 top
J91  Ext Button  [1X02_NO_SILK]  20.83,70.61 0 top
J92  [JST-2-SMD]  10.16,79.5 90 top
J93  [1X02_NO_SILK]  9.4,80.77 270 top
J94  System Power  [1X02_NO_SILK]  29.72,78.23 90 top
J95  [JST-2-SMD]  28.96,79.5 270 top
J96  [1X03_NO_SILK]  18.29,70.61 180 top
J97  Ext Button  [1X02_NO_SILK]  46.74,70.61 0 top
J98  [JST-2-SMD]  36.07,79.5 90 top
J99  [1X02_NO_SILK]  35.31,80.77 270 top
J100  System Power  [1X02_NO_SILK]  55.63,78.23 90 top
J101  [JST-2-SMD]  54.86,79.5 270 top
J102  [1X03_NO_SILK]  44.2,70.61 180 top
J103  Ext Button  [1X02_NO_SILK]  72.64,70.61 0 top
J104  [JST-2-SMD]  61.98,79.5 90 top
J105  [1X02_NO_SILK]  61.21,80.77 270 top
J106  System Power  [1X02_NO_SILK]  81.53,78.23 90 top
J107  [JST-2-SMD]  80.77,79.5 270 top
J108  [1X03_NO_SILK]  70.1,70.61 180 top
J109  Ext Button  [1X02_NO_SILK]  98.55,70.61 0 top
J110  [JST-2-SMD]  87.88,79.5 90 top
J111  [1X02_NO_SILK]  87.12,80.77 270 top
J112  System Power  [1X02_NO_SILK]  107.44,78.23 90 top
J113  [JST-2-SMD]  106.68,79.5 270 top
J114  [1X03_NO_SILK]  96.01,70.61 180 top
J115  Ext Button  [1X02_NO_SILK]  124.46,70.61 0 top
J116  [JST-2-SMD]  113.79,79.5 90 top
J117  [1X02_NO_SILK]  113.03,80.77 270 top
J118  System Power  [1X02_NO_SILK]  133.35,78.23 90 top
J119  [JST-2-SMD]  132.59,79.5 270 top
J120  [1X03_NO_SILK]  121.92,70.61 180 top
J121  Ext Button  [1X02_NO_SILK]  20.83,91.44 0 top
J122  [JST-2-SMD]  10.16,100.33 90 top
J123  [1X02_NO_SILK]  9.4,101.6 270 top
J124  System Power  [1X02_NO_SILK]  29.72,99.06 90 top
J125  [JST-2-SMD]  28.96,100.33 270 top
J126  [1X03_NO_SILK]  18.29,91.44 180 top
J127  Ext Button  [1X02_NO_SILK]  46.74,91.44 0 top
J128  [JST-2-SMD]  36.07,100.33 90 top
J129  [1X02_NO_SILK]  35.31,101.6 270 top
J130  System Power  [1X02_NO_SILK]  55.63,99.06 90 top
J131  [JST-2-SMD]  54.86,100.33 270 top
J132  [1X03_NO_SILK]  44.2,91.44 180 top
J133  Ext Button  [1X02_NO_SILK]  72.64,91.44 0 top
J134  [JST-2-SMD]  61.98,100.33 90 top
J135  [1X02_NO_SILK]  61.21,101.6 270 top
J136  System Power  [1X02_NO_SILK]  81.53,99.06 90 top
J137  [JST-2-SMD]  80.77,100.33 270 top
J138  [1X03_NO_SILK]  70.1,91.44 180 top
J139  Ext Button  [1X02_NO_SILK]  98.55,91.44 0 top
J140  [JST-2-SMD]  87.88,100.33 90 top
J141  [1X02_NO_SILK]  87.12,101.6 270 top
J142  System Power  [1X02_NO_SILK]  107.44,99.06 90 top
J143  [JST-2-SMD]  106.68,100.33 270 top
J144  [1X03_NO_SILK]  96.01,91.44 180 top
J145  Ext Button  [1X02_NO_SILK]  124.46,91.44 0 top
J146  [JST-2-SMD]  113.79,100.33 90 top
J147  [1X02_NO_SILK]  113.03,101.6 270 top
J148  System Power  [1X02_NO_SILK]  133.35,99.06 90 top
J149  [JST-2-SMD]  132.59,100.33 270 top
J150  [1X03_NO_SILK]  121.92,91.44 180 top
J151  Ext Button  [1X02_NO_SILK]  20.83,112.27 0 top
J152  [JST-2-SMD]  10.16,121.16 90 top
J153  [1X02_NO_SILK]  9.4,122.43 270 top
J154  System Power  [1X02_NO_SILK]  29.72,119.89 90 top
J155  [JST-2-SMD]  28.96,121.16 270 top
J156  [1X03_NO_SILK]  18.29,112.27 180 top
J157  Ext Button  [1X02_NO_SILK]  46.74,112.27 0 top
J158  [JST-2-SMD]  36.07,121.16 90 top
J159  [1X02_NO_SILK]  35.31,122.43 270 top
J160  System Power  [1X02_NO_SILK]  55.63,119.89 90 top
J161  [JST-2-SMD]  54.86,121.16 270 top
J162  [1X03_NO_SILK]  44.2,112.27 180 top
J163  Ext Button  [1X02_NO_SILK]  72.64,112.27 0 top
J164  [JST-2-SMD]  61.98,121.16 90 top
J165  [1X02_NO_SILK]  61.21,122.43 270 top
J166  System Power  [1X02_NO_SILK]  81.53,119.89 90 top
J167  [JST-2-SMD]  80.77,121.16 270 top
J168  [1X03_NO_SILK]  70.1,112.27 180 top
J169  Ext Button  [1X02_NO_SILK]  98.55,112.27 0 top
J170  [JST-2-SMD]  87.88,121.16 90 top
J171  [1X02_NO_SILK]  87.12,122.43 270 top
J172  System Power  [1X02_NO_SILK]  107.44,119.89 90 top
J173  [JST-2-SMD]  106.68,121.16 270 top
J174  [1X03_NO_SILK]  96.01,112.27 180 top
J175  Ext Button  [1X02_NO_SILK]  124.46,112.27 0 top
J176  [JST-2-SMD]  113.79,121.16 90 top
J177  [1X02_NO_SILK]  113.03,122.43 270 top
J178  System Power  [1X02_NO_SILK]  133.35,119.89 90 top
J179  [JST-2-SMD]  132.59,121.16 270 top
J180  [1X03_NO_SILK]  121.92,112.27 180 top
JP1  [SMT-JUMPER_2_NC_TRACE_SILK]  24.64,24.64 270 bottom
JP2  [SMT-JUMPER_3_1-NC_TRACE_SILK]  20.83,14.61 0 bottom
JP3  [SMT-JUMPER_2_NC_TRACE_SILK]  50.55,24.64 270 bottom
JP4  [SMT-JUMPER_3_1-NC_TRACE_SILK]  46.74,14.61 0 bottom
JP5  [SMT-JUMPER_2_NC_TRACE_SILK]  76.45,24.64 270 bottom
JP6  [SMT-JUMPER_3_1-NC_TRACE_SILK]  72.64,14.61 0 bottom
JP7  [SMT-JUMPER_2_NC_TRACE_SILK]  102.36,24.64 270 bottom
JP8  [SMT-JUMPER_3_1-NC_TRACE_SILK]  98.55,14.61 0 bottom
JP9  [SMT-JUMPER_2_NC_TRACE_SILK]  128.27,24.64 270 bottom
JP10  [SMT-JUMPER_3_1-NC_TRACE_SILK]  124.46,14.61 0 bottom
JP11  [SMT-JUMPER_2_NC_TRACE_SILK]  24.64,45.47 270 bottom
JP12  [SMT-JUMPER_3_1-NC_TRACE_SILK]  20.83,35.43 0 bottom
JP13  [SMT-JUMPER_2_NC_TRACE_SILK]  50.55,45.47 270 bottom
JP14  [SMT-JUMPER_3_1-NC_TRACE_SILK]  46.74,35.43 0 bottom
JP15  [SMT-JUMPER_2_NC_TRACE_SILK]  76.45,45.47 270 bottom
JP16  [SMT-JUMPER_3_1-NC_TRACE_SILK]  72.64,35.43 0 bottom
JP17  [SMT-JUMPER_2_NC_TRACE_SILK]  102.36,45.47 270 bottom
JP18  [SMT-JUMPER_3_1-NC_TRACE_SILK]  98.55,35.43 0 bottom
JP19  [SMT-JUMPER_2_NC_TRACE_SILK]  128.27,45.47 270 bottom
JP20  [SMT-JUMPER_3_1-NC_TRACE_SILK]  124.46,35.43 0 bottom
JP21  [SMT-JUMPER_2_NC_TRACE_SILK]  24.64,66.29 270 bottom
JP22  [SMT-JUMPER_3_1-NC_TRACE_SILK]  20.83,56.26 0 bottom
JP23  [SMT-JUMPER_2_NC_TRACE_SILK]  50.55,66.29 270 bottom
JP24  [SMT-JUMPER_3_1-NC_TRACE_SILK]  46.74,56.26 0 bottom
JP25  [SMT-JUMPER_2_NC_TRACE_SILK]  76.45,66.29 270 bottom
JP26  [SMT-JUMPER_3_1-NC_TRACE_SILK]  72.64,56.26 0 bottom
JP27  [SMT-JUMPER_2_NC_TRACE_SILK]  102.36,66.29 270 bottom
JP28  [SMT-JUMPER_3_1-NC_TRACE_SILK]  98.55,56.26 0 bottom
JP29  [SMT-JUMPER_2_NC_TRACE_SILK]  128.27,66.29 270 bottom
JP30  [SMT-JUMPER_3_1-NC_TRACE_SILK]  124.46,56.26 0 bottom
JP31  [SMT-JUMPER_2_NC_TRACE_SILK]  24.64,87.12 270 bottom
JP32  [SMT-JUMPER_3_1-NC_TRACE_SILK]  20.83,77.09 0 bottom
JP33  [SMT-JUMPER_2_NC_TRACE_SILK]  50.55,87.12 270 bottom
JP34  [SMT-JUMPER_3_1-NC_TRACE_SILK]  46.74,77.09 0 bottom
JP35  [SMT-JUMPER_2_NC_TRACE_SILK]  76.45,87.12 270 bottom
JP36  [SMT-JUMPER_3_1-NC_TRACE_SILK]  72.64,77.09 0 bottom
JP37  [SMT-JUMPER_2_NC_TRACE_SILK]  102.36,87.12 270 bottom
JP38  [SMT-JUMPER_3_1-NC_TRACE_SILK]  98.55,77.09 0 bottom
JP39  [SMT-JUMPER_2_NC_TRACE_SILK]  128.27,87.12 270 bottom
JP40  [SMT-JUMPER_3_1-NC_TRACE_SILK]  124.46,77.09 0 bottom
JP41  [SMT-JUMPER_2_NC_TRACE_SILK]  24.64,107.95 270 bottom
JP42  [SMT-JUMPER_3_1-NC_TRACE_SILK]  20.83,97.92 0 bottom
JP43  [SMT-JUMPER_2_NC_TRACE_SILK]  50.55,107.95 270 bottom
JP44  [SMT-JUMPER_3_1-NC_TRACE_SILK]  46.74,97.92 0 bottom
JP45  [SMT-JUMPER_2_NC_TRACE_SILK]  76.45,107.95 270 bottom
JP46  [SMT-JUMPER_3_1-NC_TRACE_SILK]  72.64,97.92 0 bottom
JP47  [SMT-JUMPER_2_NC_TRACE_SILK]  102.36,107.95 270 bottom
JP48  [SMT-JUMPER_3_1-NC_TRACE_SILK]  98.55,97.92 0 bottom
JP49  [SMT-JUMPER_2_NC_TRACE_SILK]  128.27,107.95 270 bottom
JP50  [SMT-JUMPER_3_1-NC_TRACE_SILK]  124.46,97.92 0 bottom
JP51  [SMT-JUMPER_2_NC_TRACE_SILK]  24.64,128.78 270 bottom
JP52  [SMT-JUMPER_3_1-NC_TRACE_SILK]  20.83,118.75 0 bottom
JP53  [SMT-JUMPER_2_NC_TRACE_SILK]  50.55,128.78 270 bottom
JP54  [SMT-JUMPER_3_1-NC_TRACE_SILK]  46.74,118.75 0 bottom
JP55  [SMT-JUMPER_2_NC_TRACE_SILK]  76.45,128.78 270 bottom
JP56  [SMT-JUMPER_3_1-NC_TRACE_SILK]  72.64,118.75 0 bottom
JP57  [SMT-JUMPER_2_NC_TRACE_SILK]  102.36,128.78 270 bottom
JP58  [SMT-JUMPER_3_1-NC_TRACE_SILK]  98.55,118.75 0 bottom
JP59  [SMT-JUMPER_2_NC_TRACE_SILK]  128.27,128.78 270 bottom
JP60  [SMT-JUMPER_3_1-NC_TRACE_SILK]  124.46,118.75 0 bottom
LOGO1  OSHW-LOGOS  [OSHW-LOGO-S]  9.4,20.83 0 bottom
LOGO2  OSHW-LOGOS  [OSHW-LOGO-S]  35.31,20.83 0 bottom
LOGO3  OSHW-LOGOS  [OSHW-LOGO-S]  61.21,20.83 0 bottom
LOGO4  OSHW-LOGOS  [OSHW-LOGO-S]  87.12,20.83 0 bottom
LOGO5  OSHW-LOGOS  [OSHW-LOGO-S]  113.03,20.83 0 bottom
LOGO6  OSHW-LOGOS  [OSHW-LOGO-S]  9.4,41.66 0 bottom
LOGO7  OSHW-LOGOS  [OSHW-LOGO-S]  35.31,41.66 0 bottom
LOGO8  OSHW-LOGOS  [OSHW-LOGO-S]  61.21,41.66 0 bottom
LOGO9  OSHW-LOGOS  [OSHW-LOGO-S]  87.12,41.66 0 bottom
LOGO10  OSHW-LOGOS  [OSHW-LOGO-S]  113.03,41.66 0 bottom
LOGO11  OSHW-LOGOS  [OSHW-LOGO-S]  9.4,62.48 0 bottom
LOGO12  OSHW-LOGOS  [OSHW-LOGO-S]  35.31,62.48 0 bottom
LOGO13  OSHW-LOGOS  [OSHW-LOGO-S]  61.21,62.48 0 bottom
LOGO14  OSHW-LOGOS  [OSHW-LOGO-S]  87.12,62.48 0 bottom
LOGO15  OSHW-LOGOS  [OSHW-LOGO-S]  113.03,62.48 0 bottom
LOGO16  OSHW-LOGOS  [OSHW-LOGO-S]  9.4,83.31 0 bottom
LOGO17  OSHW-LOGOS  [OSHW-LOGO-S]  35.31,83.31 0 bottom
LOGO18  OSHW-LOGOS  [OSHW-LOGO-S]  61.21,83.31 0 bottom
LOGO19  OSHW-LOGOS  [OSHW-LOGO-S]  87.12,83.31 0 bottom
LOGO20  OSHW-LOGOS  [OSHW-LOGO-S]  113.03,83.31 0 bottom
LOGO21  OSHW-LOGOS  [OSHW-LOGO-S]  9.4,104.14 0 bottom
LOGO22  OSHW-LOGOS  [OSHW-LOGO-S]  35.31,104.14 0 bottom
LOGO23  OSHW-LOGOS  [OSHW-LOGO-S]  61.21,104.14 0 bottom
LOGO24  OSHW-LOGOS  [OSHW-LOGO-S]  87.12,104.14 0 bottom
LOGO25  OSHW-LOGOS  [OSHW-LOGO-S]  113.03,104.14 0 bottom
LOGO26  OSHW-LOGOS  [OSHW-LOGO-S]  9.4,124.97 0 bottom
LOGO27  OSHW-LOGOS  [OSHW-LOGO-S]  35.31,124.97 0 bottom
LOGO28  OSHW-LOGOS  [OSHW-LOGO-S]  61.21,124.97 0 bottom
LOGO29  OSHW-LOGOS  [OSHW-LOGO-S]  87.12,124.97 0 bottom
LOGO30  OSHW-LOGOS  [OSHW-LOGO-S]  113.03,124.97 0 bottom
MEAS  [COMBO-JUMPER_2_NC_TRACE]  14.48,24.64 90 bottom
MEAS1  [COMBO-JUMPER_2_NC_TRACE]  40.39,24.64 90 bottom
MEAS2  [COMBO-JUMPER_2_NC_TRACE]  66.29,24.64 90 bottom
MEAS3  [COMBO-JUMPER_2_NC_TRACE]  92.2,24.64 90 bottom
MEAS4  [COMBO-JUMPER_2_NC_TRACE]  118.11,24.64 90 bottom
MEAS5  [COMBO-JUMPER_2_NC_TRACE]  14.48,45.47 90 bottom
MEAS6  [COMBO-JUMPER_2_NC_TRACE]  40.39,45.47 90 bottom
MEAS7  [COMBO-JUMPER_2_NC_TRACE]  66.29,45.47 90 bottom
MEAS8  [COMBO-JUMPER_2_NC_TRACE]  92.2,45.47 90 bottom
MEAS9  [COMBO-JUMPER_2_NC_TRACE]  118.11,45.47 90 bottom
MEAS10  [COMBO-JUMPER_2_NC_TRACE]  14.48,66.29 90 bottom
MEAS11  [COMBO-JUMPER_2_NC_TRACE]  40.39,66.29 90 bottom
MEAS12  [COMBO-JUMPER_2_NC_TRACE]  66.29,66.29 90 bottom
MEAS13  [COMBO-JUMPER_2_NC_TRACE]  92.2,66.29 90 bottom
MEAS14  [COMBO-JUMPER_2_NC_TRACE]  118.11,66.29 90 bottom
MEAS15  [COMBO-JUMPER_2_NC_TRACE]  14.48,87.12 90 bottom
MEAS16  [COMBO-JUMPER_2_NC_TRACE]  40.39,87.12 90 bottom
MEAS17  [COMBO-JUMPER_2_NC_TRACE]  66.29,87.12 90 bottom
MEAS18  [COMBO-JUMPER_2_NC_TRACE]  92.2,87.12 90 bottom
MEAS19  [COMBO-JUMPER_2_NC_TRACE]  118.11,87.12 90 bottom
MEAS20  [COMBO-JUMPER_2_NC_TRACE]  14.48,107.95 90 bottom
MEAS21  [COMBO-JUMPER_2_NC_TRACE]  40.39,107.95 90 bottom
MEAS22  [COMBO-JUMPER_2_NC_TRACE]  66.29,107.95 90 bottom
MEAS23  [COMBO-JUMPER_2_NC_TRACE]  92.2,107.95 90 bottom
MEAS24  [COMBO-JUMPER_2_NC_TRACE]  118.11,107.95 90 bottom
MEAS25  [COMBO-JUMPER_2_NC_TRACE]  14.48,128.78 90 bottom
MEAS26  [COMBO-JUMPER_2_NC_TRACE]  40.39,128.78 90 bottom
MEAS27  [COMBO-JUMPER_2_NC_TRACE]  66.29,128.78 90 bottom
MEAS28  [COMBO-JUMPER_2_NC_TRACE]  92.2,128.78 90 bottom
MEAS29  [COMBO-JUMPER_2_NC_TRACE]  118.11,128.78 90 bottom
Q1  SIL2308-TP  [SOT26]  19.56,17.02 0 top
Q2  SIL2308-TP  [SOT26]  45.47,17.02 0 top
Q3  SIL2308-TP  [SOT26]  71.37,17.02 0 top
Q4  SIL2308-TP  [SOT26]  97.28,17.02 0 top
Q5  SIL2308-TP  [SOT26]  123.19,17.02 0 top
Q6  SIL2308-TP  [SOT26]  19.56,37.85 0 top
Q7  SIL2308-TP  [SOT26]  45.47,37.85 0 top
Q8  SIL2308-TP  [SOT26]  71.37,37.85 0 top
Q9  SIL2308-TP  [SOT26]  97.28,37.85 0 top
Q10  SIL2308-TP  [SOT26]  123.19,37.85 0 top
Q11  SIL2308-TP  [SOT26]  19.56,58.67 0 top
Q12  SIL2308-TP  [SOT26]  45.47,58.67 0 top
Q13  SIL2308-TP  [SOT26]  71.37,58.67 0 top
Q14  SIL2308-TP  [SOT26]  97.28,58.67 0 top
Q15  SIL2308-TP  [SOT26]  123.19,58.67 0 top
Q16  SIL2308-TP  [SOT26]  19.56,79.5 0 top
Q17  SIL2308-TP  [SOT26]  45.47,79.5 0 top
Q18  SIL2308-TP  [SOT26]  71.37,79.5 0 top
Q19  SIL2308-TP  [SOT26]  97.28,79.5 0 top
Q20  SIL2308-TP  [SOT26]  123.19,79.5 0 top
Q21  SIL2308-TP  [SOT26]  19.56,100.33 0 top
Q22  SIL2308-TP  [SOT26]  45.47,100.33 0 top
Q23  SIL2308-TP  [SOT26]  71.37,100.33 0 top
Q24  SIL2308-TP  [SOT26]  97.28,100.33 0 top
Q25  SIL2308-TP  [SOT26]  123.19,100.33 0 top
Q26  SIL2308-TP  [SOT26]  19.56,121.16 0 top
Q27  SIL2308-TP  [SOT26]  45.47,121.16 0 top
Q28  SIL2308-TP  [SOT26]  71.37,121.16 0 top
Q29  SIL2308-TP  [SOT26]  97.28,121.16 0 top
Q30  SIL2308-TP  [SOT26]  123.19,121.16 0 top
R1  10k  [0603]  19.56,13.21 90 top
R2  1k  [0603]  25.91,24.64 270 top
R3  100k  [0603]  22.1,14.1 0 top
R4  10k  [0603]  15.75,13.21 90 top
R5  300k  [0603]  17.65,13.21 270 top
R6  1k  [0603]  51.82,24.64 270 top
R7  10k  [0603]  41.66,13.21 90 top
R8  300k  [0603]  43.56,13.21 270 top
R9  100k  [0603]  48.01,14.1 0 top
R10  10k  [0603]  45.47,13.21 90 top
R11  1k  [0603]  77.72,24.64 270 top
R12  10k  [0603]  67.56,13.21 90 top
R13  300k  [0603]  69.47,13.21 270 top
R14  100k  [0603]  73.91,14.1 0 top
R15  10k  [0603]  71.37,13.21 90 top
R16  1k  [0603]  103.63,24.64 270 top
R17  10k  [0603]  93.47,13.21 90 top
R18  300k  [0603]  95.38,13.21 270 top
R19  100k  [0603]  99.82,14.1 0 top
R20  10k  [0603]  97.28,13.21 90 top
R21  1k  [0603]  129.54,24.64 270 top
R22  10k  [0603]  119.38,13.21 90 top
R23  300k  [0603]  121.29,13.21 270 top
R24  100k  [0603]  125.73,14.1 0 top
R25  10k  [0603]  123.19,13.21 90 top
R26  1k  [0603]  25.91,45.47 270 top
R27  10k  [0603]  15.75,34.04 90 top
R28  300k  [0603]  17.65,34.04 270 top
R29  100k  [0603]  22.1,34.92 0 top
R30  10k  [0603]  19.56,34.04 90 top
R31  1k  [0603]  51.82,45.47 270 top
R32  10k  [0603]  41.66,34.04 90 top
R33  300k  [0603]  43.56,34.04 270 top
R34  100k  [0603]  48.01,34.92 0 top
R35  10k  [0603]  45.47,34.04 90 top
R36  1k  [0603]  77.72,45.47 270 top
R37  10k  [0603]  67.56,34.04 90 top
R38  300k  [0603]  69.47,34.04 270 top
R39  100k  [0603]  73.91,34.92 0 top
R40  10k  [0603]  71.37,34.04 90 top
R41  1k  [0603]  103.63,45.47 270 top
R42  10k  [0603]  93.47,34.04 90 top
R43  300k  [0603]  95.38,34.04 270 top
R44  100k  [0603]  99.82,34.92 0 top
R45  10k  [0603]  97.28,34.04 90 top
R46  1k  [0603]  129.54,45.47 270 top
R47  10k  [0603]  119.38,34.04 90 top
R48  300k  [0603]  121.29,34.04 270 top
R49  100k  [0603]  125.73,34.92 0 top
R50  10k  [0603]  123.19,34.04 90 top
R51  1k  [0603]  25.91,66.29 270 top
R52  10k  [0603]  15.75,54.86 90 top
R53  300k  [0603]  17.65,54.86 270 top
R54  100k  [0603]  22.1,55.75 0 top
R55  10k  [0603]  19.56,54.86 90 top
R56  1k  [0603]  51.82,66.29 270 top
R57  10k  [0603]  41.66,54.86 90 top
R58  300k  [0603]  43.56,54.86 270 top
R59  100k  [0603]  48.01,55.75 0 top
R60  10k  [0603]  45.47,54.86 90 top
R61  1k  [0603]  77.72,66.29 270 top
R62  10k  [0603]  67.56,54.86 90 top
R63  300k  [0603]  69.47,54.86 270 top
R64  100k  [0603]  73.91,55.75 0 top
R65  10k  [0603]  71.37,54.86 90 top
R66  1k  [0603]  103.63,66.29 270 top
R67  10k  [0603]  93.47,54.86 90 top
R68  300k  [0603]  95.38,54.86 270 top
R69  100k  [0603]  99.82,55.75 0 top
R70  10k  [0603]  97.28,54.86 90 top
R71  1k  [0603]  129.54,66.29 270 top
R72  10k  [0603]  119.38,54.86 90 top
R73  300k  [0603]  121.29,54.86 270 top
R74  100k  [0603]  125.73,55.75 0 top
R75  10k  [0603]  123.19,54.86 90 top
R76  1k  [0603]  25.91,87.12 270 top
R77  10k  [0603]  15.75,75.69 90 top
R78  300k  [0603]  17.65,75.69 270 top
R79  100k  [0603]  22.1,76.58 0 top
R80  10k  [0603]  19.56,75.69 90 top
R81  1k  [0603]  51.82,87.12 270 top
R82  10k  [0603]  41.66,75.69 90 top
R83  300k  [0603]  43.56,75.69 270 top
R84  100k  [0603]  48.01,76.58 0 top
R85  10k  [0603]  45.47,75.69 90 top
R86  1k  [0603]  77.72,87.12 270 top
R87  10k  [0603]  67.56,75.69 90 top
R88  300k  [0603]  69.47,75.69 270 top
R89  100k  [0603]  73.91,76.58 0 top
R90  10k  [0603]  71.37,75.69 90 top
R91  1k  [0603]  103.63,87.12 270 top
R92  10k  [0603]  93.47,75.69 90 top
R93  300k  [0603]  95.38,75.69 270 top
R94  100k  [0603]  99.82,76.58 0 top
R95  10k  [0603]  97.28,75.69 90 top
R96  1k  [0603]  129.54,87.12 270 top
R97  10k  [0603]  119.38,75.69 90 top
R98  300k  [0603]  121.29,75.69 270 top
R99  100k  [0603]  125.73,76.58 0 top
R100  10k  [0603]  123.19,75.69 90 top
R101  1k  [0603]  25.91,107.95 270 top
R102  10k  [0603]  15.75,96.52 90 top
R103  300k  [0603]  17.65,96.52 270 top
R104  100k  [0603]  22.1,97.41 0 top
R105  10k  [0603]  19.56,96.52 90 top
R106  1k  [0603]  51.82,107.95 270 top
R107  10k  [0603]  41.66,96.52 90 top
R108  300k  [0603]  43.56,96.52 270 top
R109  100k  [0603]  48.01,97.41 0 top
R110  10k  [0603]  45.47,96.52 90 top
R111  1k  [0603]  77.72,107.95 270 top
R112  10k  [0603]  67.56,96.52 90 top
R113  300k  [0603]  69.47,96.52 270 top
R114  100k  [0603]  73.91,97.41 0 top
R115  10k  [0603]  71.37,96.52 90 top
R116  1k  [0603]  103.63,107.95 270 top
R117  10k  [0603]  93.47,96.52 90 top
R118  300k  [0603]  95.38,96.52 270 top
R119  100k  [0603]  99.82,97.41 0 top
R120  10k  [0603]  97.28,96.52 90 top
R121  1k  [0603]  129.54,107.95 270 top
R122  10k  [0603]  119.38,96.52 90 top
R123  300k  [0603]  121.29,96.52 270 top
R124  100k  [0603]  125.73,97.41 0 top
R125  10k  [0603]  123.19,96.52 90 top
R126  1k  [0603]  25.91,128.78 270 top
R127  10k  [0603]  15.75,117.35 90 top
R128  300k  [0603]  17.65,117.35 270 top
R129  100k  [0603]  22.1,118.24 0 top
R130  10k  [0603]  19.56,117.35 90 top
R131  1k  [0603]  51.82,128.78 270 top
R132  10k  [0603]  41.66,117.35 90 top
R133  300k  [0603]  43.56,117.35 270 top
R134  100k  [0603]  48.01,118.24 0 top
R135  10k  [0603]  45.47,117.35 90 top
R136  1k  [0603]  77.72,128.78 270 top
R137  10k  [0603]  67.56,117.35 90 top
R138  300k  [0603]  69.47,117.35 270 top
R139  100k  [0603]  73.91,118.24 0 top
R140  10k  [0603]  71.37,117.35 90 top
R141  1k  [0603]  103.63,128.78 270 top
R142  10k  [0603]  93.47,117.35 90 top
R143  300k  [0603]  95.38,117.35 270 top
R144  100k  [0603]  99.82,118.24 0 top
R145  10k  [0603]  97.28,117.35 90 top
R146  1k  [0603]  129.54,128.78 270 top
R147  10k  [0603]  119.38,117.35 90 top
R148  300k  [0603]  121.29,117.35 270 top
R149  100k  [0603]  125.73,118.24 0 top
R150  10k  [0603]  123.19,117.35 90 top
S1  Power  [TACTILE_SWITCH_SMD_5.2MM]  19.56,23.37 0 top
S2  Power  [TACTILE_SWITCH_SMD_5.2MM]  45.47,23.37 0 top
S3  Power  [TACTILE_SWITCH_SMD_5.2MM]  71.37,23.37 0 top
S4  Power  [TACTILE_SWITCH_SMD_5.2MM]  97.28,23.37 0 top
S5  Power  [TACTILE_SWITCH_SMD_5.2MM]  123.19,23.37 0 top
S6  Power  [TACTILE_SWITCH_SMD_5.2MM]  19.56,44.2 0 top
S7  Power  [TACTILE_SWITCH_SMD_5.2MM]  45.47,44.2 0 top
S8  Power  [TACTILE_SWITCH_SMD_5.2MM]  71.37,44.2 0 top
S9  Power  [TACTILE_SWITCH_SMD_5.2MM]  97.28,44.2 0 top
S10  Power  [TACTILE_SWITCH_SMD_5.2MM]  123.19,44.2 0 top
S11  Power  [TACTILE_SWITCH_SMD_5.2MM]  19.56,65.02 0 top
S12  Power  [TACTILE_SWITCH_SMD_5.2MM]  45.47,65.02 0 top
S13  Power  [TACTILE_SWITCH_SMD_5.2MM]  71.37,65.02 0 top
S14  Power  [TACTILE_SWITCH_SMD_5.2MM]  97.28,65.02 0 top
S15  Power  [TACTILE_SWITCH_SMD_5.2MM]  123.19,65.02 0 top
S16  Power  [TACTILE_SWITCH_SMD_5.2MM]  19.56,85.85 0 top
S17  Power  [TACTILE_SWITCH_SMD_5.2MM]  45.47,85.85 0 top
S18  Power  [TACTILE_SWITCH_SMD_5.2MM]  71.37,85.85 0 top
S19  Power  [TACTILE_SWITCH_SMD_5.2MM]  97.28,85.85 0 top
S20  Power  [TACTILE_SWITCH_SMD_5.2MM]  123.19,85.85 0 top
S21  Power  [TACTILE_SWITCH_SMD_5.2MM]  19.56,106.68 0 top
S22  Power  [TACTILE_SWITCH_SMD_5.2MM]  45.47,106.68 0 top
S23  Power  [TACTILE_SWITCH_SMD_5.2MM]  71.37,106.68 0 top
S24  Power  [TACTILE_SWITCH_SMD_5.2MM]  97.28,106.68 0 top
S25  Power  [TACTILE_SWITCH_SMD_5.2MM]  123.19,106.68 0 top
S26  Power  [TACTILE_SWITCH_SMD_5.2MM]  19.56,127.51 0 top
S27  Power  [TACTILE_SWITCH_SMD_5.2MM]  45.47,127.51 0 top
S28  Power  [TACTILE_SWITCH_SMD_5.2MM]  71.37,127.51 0 top
S29  Power  [TACTILE_SWITCH_SMD_5.2MM]  97.28,127.51 0 top
S30  Power  [TACTILE_SWITCH_SMD_5.2MM]  123.19,127.51 0 top
U$1  SPARKX-LOGO3  [SPARKX-SMALL]  19.56,22.1 0 bottom
U$2  [#BTN#2]  20.83,10.79 90 bottom
U$3  [#GND#0]  23.37,10.79 90 bottom
U$4  [#GND#0]  18.29,10.79 90 bottom
U$5  [#SEN#CTRL#1]  13.21,13.08 90 bottom
U$6  [ON#OFF0]  19.56,26.54 0 top
U$7  [BATT0]  10.67,22.1 0 top
U$8  [SYS1]  28.45,22.1 0 top
U$9  [#0]  14.61,19.3 0 top
U$10  [#0]  24.64,14.73 0 top
U$11  [#1]  24.51,19.18 270 top
U$12  [#1]  14.61,14.61 270 top
U$13  [#MEAS#0]  14.48,20.19 90 bottom
U$14  [#0]  11.3,18.29 0 bottom
U$15  SPARKX-LOGO2  [SPARKX-TINY]  12.83,12.32 0 top
U$16  [OFF1]  18.41,14.48 90 bottom
U$17  [SWITCH2]  24.89,10.16 270 top
U$18  [ON0]  24.64,22.1 0 top
U$19  [#LED#0]  24.64,21.59 90 bottom
U$20  [#1]  11.56,15.75 180 bottom
U$21  [SOFT_0]  27.3,10.03 270 top
U$22  [#0]  27.69,15.75 0 bottom
U$23  [#1]  27.94,18.29 180 bottom
U$24  [POWER_1]  26.16,10.03 270 top
U$25  [ON0]  23.24,14.61 90 bottom
U$26  [#FASTOFF#0]  15.75,12.83 90 bottom
U$27  [SOFT0]  19.56,19.94 0 bottom
U$28  [POWER1]  19.56,18.41 0 bottom
U$29  [BATT0]  7.62,17.02 90 bottom
U$30  [SWITCH_2]  19.56,16.64 0 bottom
U$31  [SYS1]  31.5,16.89 270 bottom
U$32  SPARKX-LOGO3  [SPARKX-SMALL]  45.47,22.1 0 bottom
U$33  [#BTN#2]  46.74,10.79 90 bottom
U$34  [#GND#0]  49.28,10.79 90 bottom
U$35  [#GND#0]  44.2,10.79 90 bottom
U$36  [#SEN#CTRL#1]  39.12,13.08 90 bottom
U$37  [ON#OFF0]  45.47,26.54 0 top
U$38  [BATT0]  36.58,22.1 0 top
U$39  [SYS1]  54.36,22.1 0 top
U$40  [#0]  40.51,19.3 0 top
U$41  [#0]  50.55,14.73 0 top
U$42  [#1]  50.42,19.18 270 top
U$43  [#1]  40.51,14.61 270 top
U$44  [#MEAS#0]  40.39,20.19 90 bottom
U$45  [SWITCH2]  50.8,10.16 270 top
U$46  [ON0]  50.55,22.1 0 top
U$47  [#LED#0]  50.55,21.59 90 bottom
U$48  [#0]  37.21,18.29 0 bottom
U$49  [#1]  37.46,15.75 180 bottom
U$50  [#0]  53.59,15.75 0 bottom
U$51  [#1]  53.85,18.29 180 bottom
U$52  [SOFT0]  45.47,19.94 0 bottom
U$53  [POWER1]  45.47,18.41 0 bottom
U$54  [SWITCH_2]  45.47,16.64 0 bottom
U$55  [SOFT_0]  53.21,10.03 270 top
U$56  [POWER_1]  52.07,10.03 270 top
U$57  [OFF1]  44.32,14.48 90 bottom
U$58  [ON0]  49.15,14.61 90 bottom
U$59  [#FASTOFF#0]  41.66,12.83 90 bottom
U$60  [BATT0]  33.53,17.02 90 bottom
U$61  [SYS1]  57.4,16.89 270 bottom
U$62  SPARKX-LOGO2  [SPARKX-TINY]  38.73,12.32 0 top
U$63  SPARKX-LOGO3  [SPARKX-SMALL]  71.37,22.1 0 bottom
U$64  [#BTN#2]  72.64,10.79 90 bottom
U$65  [#GND#0]  75.18,10.79 90 bottom
U$66  [#GND#0]  70.1,10.79 90 bottom
U$67  [#SEN#CTRL#1]  65.02,13.08 90 bottom
U$68  [ON#OFF0]  71.37,26.54 0 top
U$69  [BATT0]  62.48,22.1 0 top
U$70  [SYS1]  80.26,22.1 0 top
U$71  [#0]  66.42,19.3 0 top
U$72  [#0]  76.45,14.73 0 top
U$73  [#1]  76.33,19.18 270 top
U$74  [#1]  66.42,14.61 270 top
U$75  [#MEAS#0]  66.29,20.19 90 bottom
U$76  [SWITCH2]  76.71,10.16 270 top
U$77  [ON0]  76.45,22.1 0 top
U$78  [#LED#0]  76.45,21.59 90 bottom
U$79  [#0]  63.12,18.29 0 bottom
U$80  [#1]  63.37,15.75 180 bottom
U$81  [#0]  79.5,15.75 0 bottom
U$82  [#1]  79.76,18.29 180 bottom
U$83  [SOFT0]  71.37,19.94 0 bottom
U$84  [POWER1]  71.37,18.41 0 bottom
U$85  [SWITCH_2]  71.37,16.64 0 bottom
U$86  [SOFT_0]  79.12,10.03 270 top
U$87  [POWER_1]  77.98,10.03 270 top
U$88  [OFF1]  70.23,14.48 90 bottom
U$89  [ON0]  75.06,14.61 90 bottom
U$90  [#FASTOFF#0]  67.56,12.83 90 bottom
U$91  [BATT0]  59.44,17.02 90 bottom
U$92  [SYS1]  83.31,16.89 270 bottom
U$93  SPARKX-LOGO2  [SPARKX-TINY]  64.64,12.32 0 top
U$94  SPARKX-LOGO3  [SPARKX-SMALL]  97.28,22.1 0 bottom
U$95  [#BTN#2]  98.55,10.79 90 bottom
U$96  [#GND#0]  101.09,10.79 90 bottom
U$97  [#GND#0]  96.01,10.79 90 bottom
U$98  [#SEN#CTRL#1]  90.93,13.08 90 bottom
U$99  [ON#OFF0]  97.28,26.54 0 top
U$100  [BATT0]  88.39,22.1 0 top
U$101  [SYS1]  106.17,22.1 0 top
U$102  [#0]  92.33,19.3 0 top
U$103  [#0]  102.36,14.73 0 top
U$104  [#1]  102.23,19.18 270 top
U$105  [#1]  92.33,14.61 270 top
U$106  [#MEAS#0]  92.2,20.19 90 bottom
U$107  [SWITCH2]  102.62,10.16 270 top
U$108  [ON0]  102.36,22.1 0 top
U$109  [#LED#0]  102.36,21.59 90 bottom
U$110  [#0]  89.03,18.29 0 bottom
U$111  [#1]  89.28,15.75 180 bottom
U$112  [#0]  105.41,15.75 0 bottom
U$113  [#1]  105.66,18.29 180 bottom
U$114  [SOFT0]  97.28,19.94 0 bottom
U$115  [POWER1]  97.28,18.41 0 bottom
U$116  [SWITCH_2]  97.28,16.64 0 bottom
U$117  [SOFT_0]  105.03,10.03 270 top